# EAGLE board SparkFun BabyBuck Regulator - AP63203-Panel (EAGLE 9.5.2), part 1 of 6
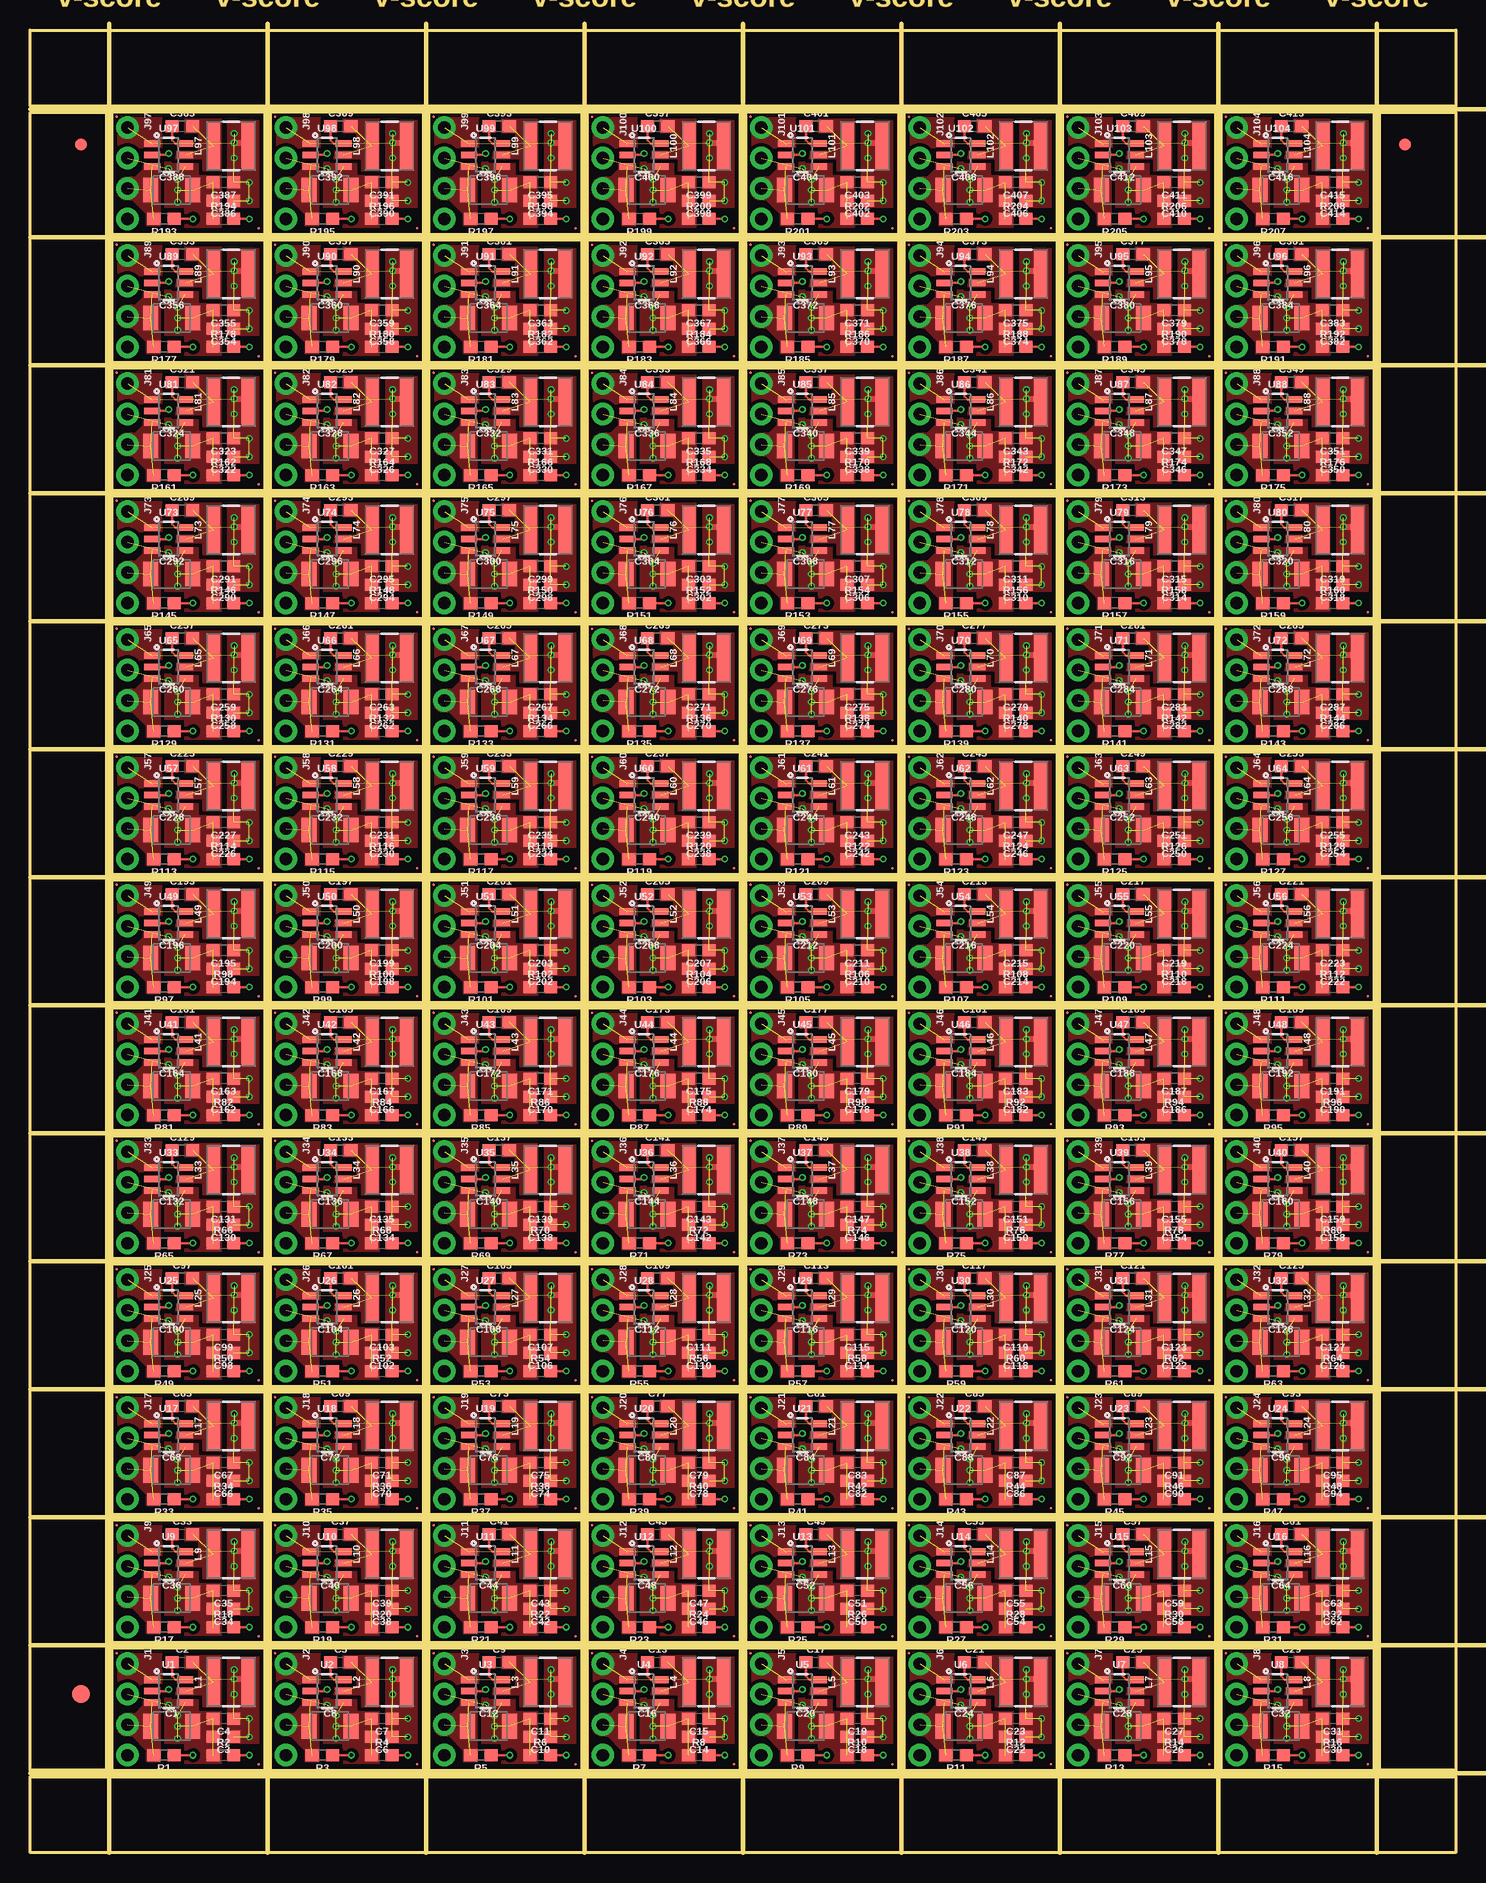
[diagram p0: board, top side]
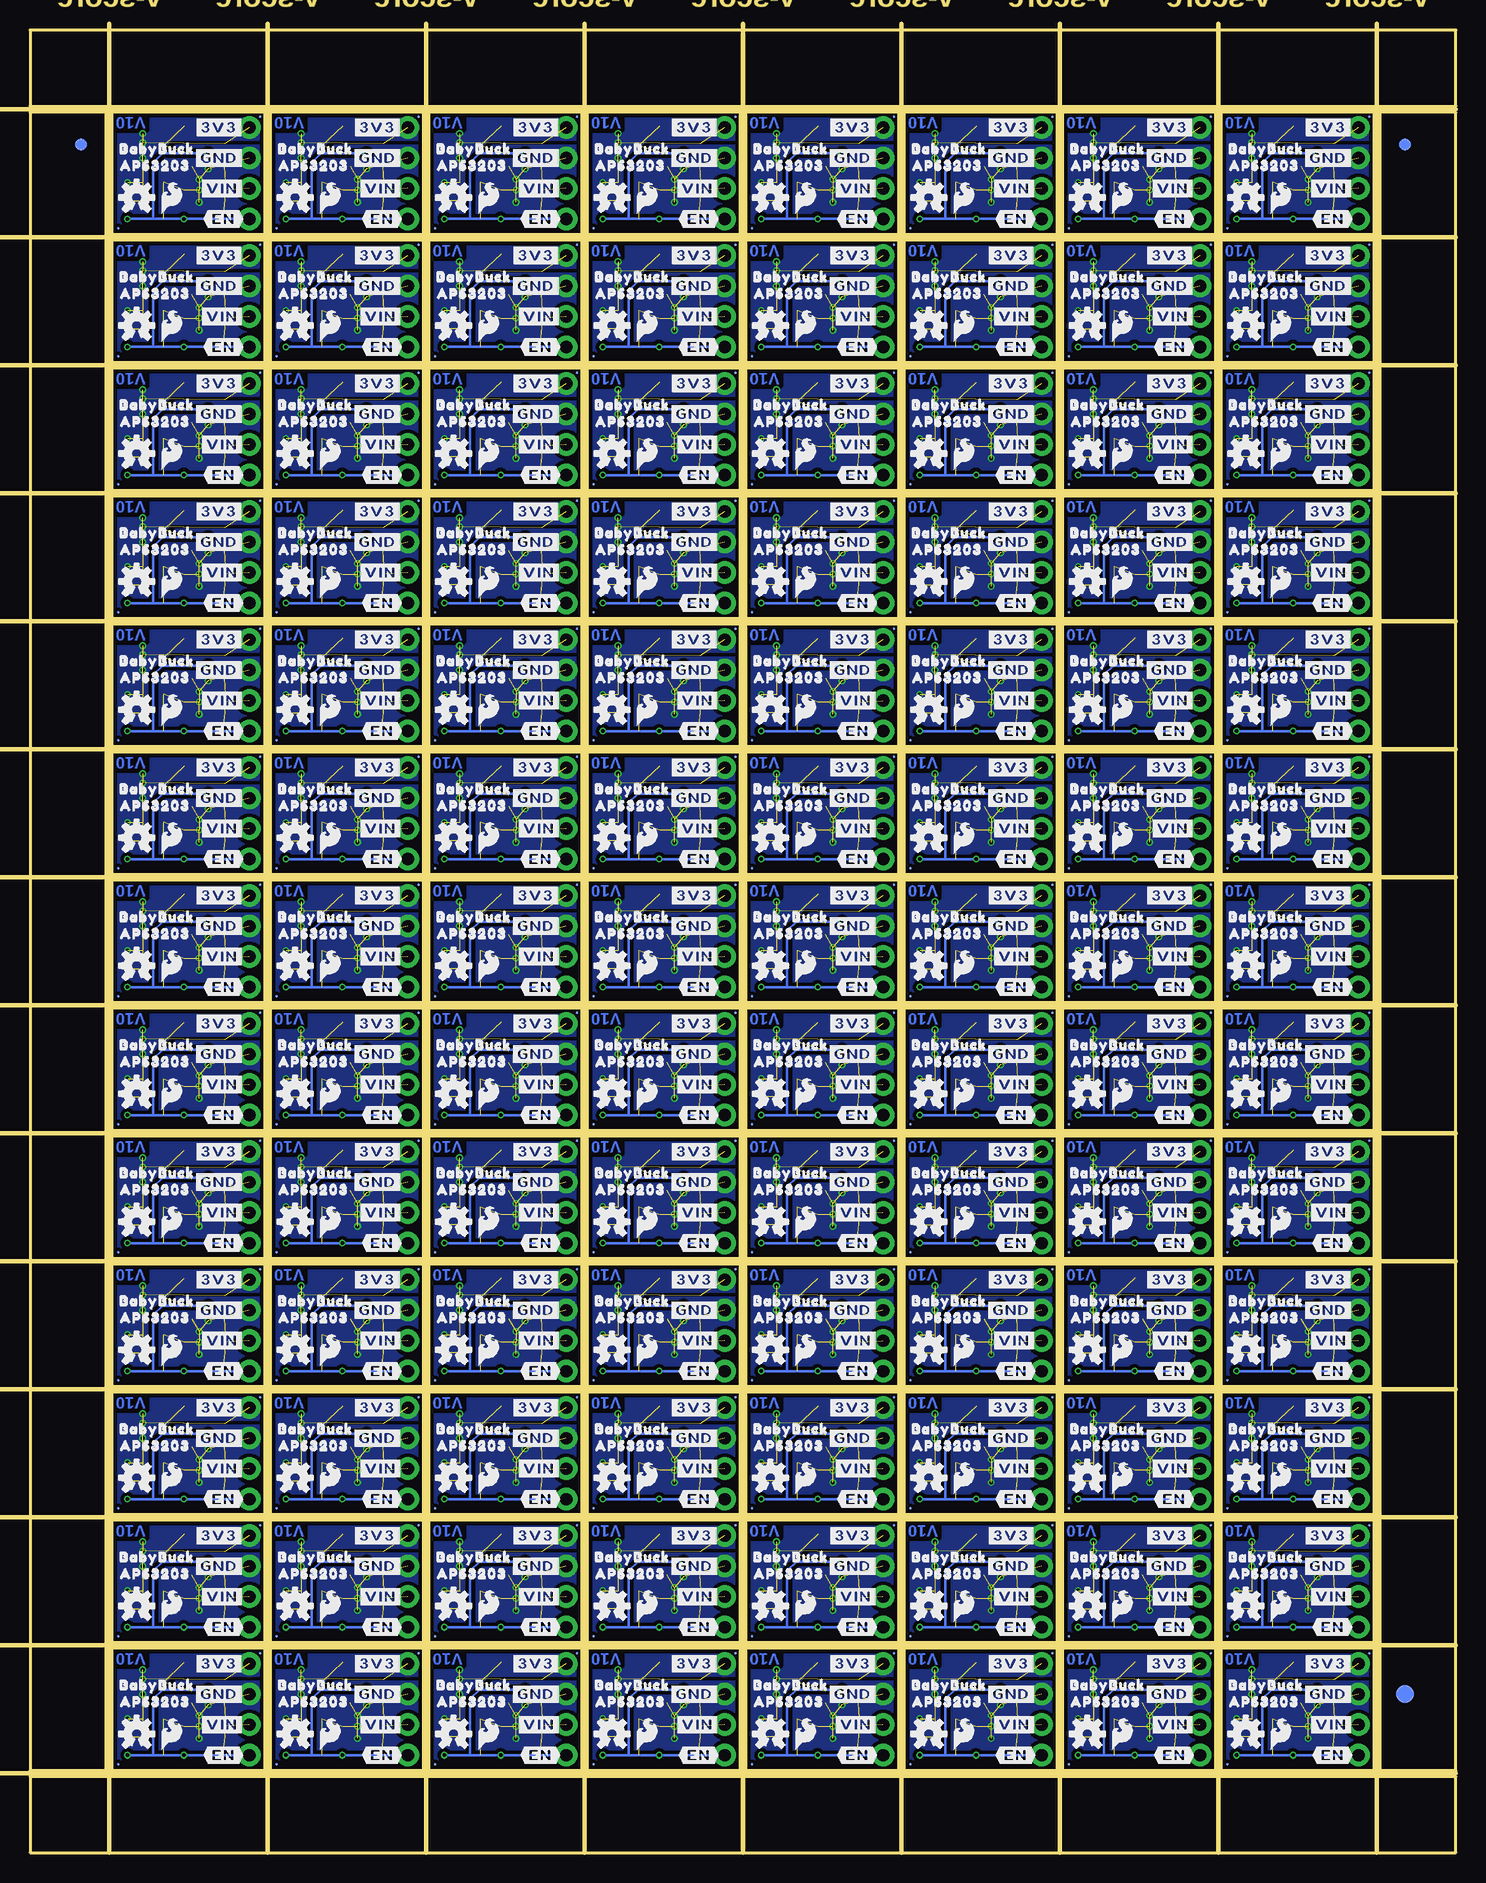
[diagram p1: board, bottom side, seen from below]

Size 118.87 x 151.89 mm. Coordinates in mm from the lower left corner, seen from the top.
Outline: 432 segments
Copper layers (1*16): Top 0.035mm / dielectric 1.5mm / Bottom 0.035mm
Design rules "SparkFun BabyBuck Regulator - AP63203": minimum track width 5mil, minimum drill 0.3mm, track to track 5mil, track to pad 5mil, pad to pad 5mil, via to via 5mil, smd to smd 5mil, copper to edge 7mil, drill to drill 7mil, minimum pad ring 5mil, minimum via ring 5mil, stop-mask expansion 2.5mil, vias tented up to drill 25mil, thermal gap 10mil
Milling: 23 lines

## Footprints (pad centres in the part's own frame; a part is rotated, then mirrored left to right if it is on the bottom)
1210 = smd 1.27 x 2.06: 1 -1.755,0; 2 1.755,0
0603 = smd 1.1 x 1: 1 -0.85,0; 2 0.85,0
FIDUCIAL-1X2 = smd 1 x 1: 1 0,0
FIDUCIAL-1.5X3 = smd 1.5 x 1.5: 1 0,0
FIDUCIAL-0.2MM = smd 0.2 x 0.2: 1 0,0
1X04_NO_SILK = drill 1.016 pad 1.88: 1 0,0; 2 2.54,0; 3 5.08,0; 4 7.62,0
INDUCTOR_4X4MM = smd 4.089 x 1.143: P$1 0,1.473; P$2 0,-1.473
SOT23-6 = smd 0.55 x 1.35: 1 -0.95,-1.375; 2 0,-1.375; 3 0.95,-1.375; 4 0.95,1.375; 5 0,1.375; 6 -0.95,1.375

## Placement (x,y rotation side)
C1  10uF  [1210]  11.81,10.54 0 top
C2  0.1uF  [0603]  12.7,15.88 0 top
C3  22uF  [0603]  16.13,9.65 180 top
C4  22uF  [0603]  16.13,11.18 180 top
C5  0.1uF  [0603]  25.91,15.88 0 top
C6  22uF  [0603]  29.34,9.65 180 top
C7  22uF  [0603]  29.34,11.18 180 top
C8  10uF  [1210]  25.02,10.54 0 top
C9  0.1uF  [0603]  39.12,15.88 0 top
C10  22uF  [0603]  42.54,9.65 180 top
C11  22uF  [0603]  42.54,11.18 180 top
C12  10uF  [1210]  38.23,10.54 0 top
C13  0.1uF  [0603]  52.32,15.88 0 top
C14  22uF  [0603]  55.75,9.65 180 top
C15  22uF  [0603]  55.75,11.18 180 top
C16  10uF  [1210]  51.43,10.54 0 top
C17  0.1uF  [0603]  65.53,15.88 0 top
C18  22uF  [0603]  68.96,9.65 180 top
C19  22uF  [0603]  68.96,11.18 180 top
C20  10uF  [1210]  64.64,10.54 0 top
C21  0.1uF  [0603]  78.74,15.88 0 top
C22  22uF  [0603]  82.17,9.65 180 top
C23  22uF  [0603]  82.17,11.18 180 top
C24  10uF  [1210]  77.85,10.54 0 top
C25  0.1uF  [0603]  91.95,15.88 0 top
C26  22uF  [0603]  95.38,9.65 180 top
C27  22uF  [0603]  95.38,11.18 180 top
C28  10uF  [1210]  91.06,10.54 0 top
C29  0.1uF  [0603]  105.16,15.88 0 top
C30  22uF  [0603]  108.59,9.65 180 top
C31  22uF  [0603]  108.59,11.18 180 top
C32  10uF  [1210]  104.27,10.54 0 top
C33  0.1uF  [0603]  12.7,26.54 0 top
C34  22uF  [0603]  16.13,20.32 180 top
C35  22uF  [0603]  16.13,21.84 180 top
C36  10uF  [1210]  11.81,21.21 0 top
C37  0.1uF  [0603]  25.91,26.54 0 top
C38  22uF  [0603]  29.34,20.32 180 top
C39  22uF  [0603]  29.34,21.84 180 top
C40  10uF  [1210]  25.02,21.21 0 top
C41  0.1uF  [0603]  39.12,26.54 0 top
C42  22uF  [0603]  42.54,20.32 180 top
C43  22uF  [0603]  42.54,21.84 180 top
C44  10uF  [1210]  38.23,21.21 0 top
C45  0.1uF  [0603]  52.32,26.54 0 top
C46  22uF  [0603]  55.75,20.32 180 top
C47  22uF  [0603]  55.75,21.84 180 top
C48  10uF  [1210]  51.43,21.21 0 top
C49  0.1uF  [0603]  65.53,26.54 0 top
C50  22uF  [0603]  68.96,20.32 180 top
C51  22uF  [0603]  68.96,21.84 180 top
C52  10uF  [1210]  64.64,21.21 0 top
C53  0.1uF  [0603]  78.74,26.54 0 top
C54  22uF  [0603]  82.17,20.32 180 top
C55  22uF  [0603]  82.17,21.84 180 top
C56  10uF  [1210]  77.85,21.21 0 top
C57  0.1uF  [0603]  91.95,26.54 0 top
C58  22uF  [0603]  95.38,20.32 180 top
C59  22uF  [0603]  95.38,21.84 180 top
C60  10uF  [1210]  91.06,21.21 0 top
C61  0.1uF  [0603]  105.16,26.54 0 top
C62  22uF  [0603]  108.59,20.32 180 top
C63  22uF  [0603]  108.59,21.84 180 top
C64  10uF  [1210]  104.27,21.21 0 top
C65  0.1uF  [0603]  12.7,37.21 0 top
C66  22uF  [0603]  16.13,30.99 180 top
C67  22uF  [0603]  16.13,32.51 180 top
C68  10uF  [1210]  11.81,31.88 0 top
C69  0.1uF  [0603]  25.91,37.21 0 top
C70  22uF  [0603]  29.34,30.99 180 top
C71  22uF  [0603]  29.34,32.51 180 top
C72  10uF  [1210]  25.02,31.88 0 top
C73  0.1uF  [0603]  39.12,37.21 0 top
C74  22uF  [0603]  42.54,30.99 180 top
C75  22uF  [0603]  42.54,32.51 180 top
C76  10uF  [1210]  38.23,31.88 0 top
C77  0.1uF  [0603]  52.32,37.21 0 top
C78  22uF  [0603]  55.75,30.99 180 top
C79  22uF  [0603]  55.75,32.51 180 top
C80  10uF  [1210]  51.43,31.88 0 top
C81  0.1uF  [0603]  65.53,37.21 0 top
C82  22uF  [0603]  68.96,30.99 180 top
C83  22uF  [0603]  68.96,32.51 180 top
C84  10uF  [1210]  64.64,31.88 0 top
C85  0.1uF  [0603]  78.74,37.21 0 top
C86  22uF  [0603]  82.17,30.99 180 top
C87  22uF  [0603]  82.17,32.51 180 top
C88  10uF  [1210]  77.85,31.88 0 top
C89  0.1uF  [0603]  91.95,37.21 0 top
C90  22uF  [0603]  95.38,30.99 180 top
C91  22uF  [0603]  95.38,32.51 180 top
C92  10uF  [1210]  91.06,31.88 0 top
C93  0.1uF  [0603]  105.16,37.21 0 top
C94  22uF  [0603]  108.59,30.99 180 top
C95  22uF  [0603]  108.59,32.51 180 top
C96  10uF  [1210]  104.27,31.88 0 top
C97  0.1uF  [0603]  12.7,47.88 0 top
C98  22uF  [0603]  16.13,41.66 180 top
C99  22uF  [0603]  16.13,43.18 180 top
C100  10uF  [1210]  11.81,42.54 0 top
C101  0.1uF  [0603]  25.91,47.88 0 top
C102  22uF  [0603]  29.34,41.66 180 top
C103  22uF  [0603]  29.34,43.18 180 top
C104  10uF  [1210]  25.02,42.54 0 top
C105  0.1uF  [0603]  39.12,47.88 0 top
C106  22uF  [0603]  42.54,41.66 180 top
C107  22uF  [0603]  42.54,43.18 180 top
C108  10uF  [1210]  38.23,42.54 0 top
C109  0.1uF  [0603]  52.32,47.88 0 top
C110  22uF  [0603]  55.75,41.66 180 top
C111  22uF  [0603]  55.75,43.18 180 top
C112  10uF  [1210]  51.43,42.54 0 top
C113  0.1uF  [0603]  65.53,47.88 0 top
C114  22uF  [0603]  68.96,41.66 180 top
C115  22uF  [0603]  68.96,43.18 180 top
C116  10uF  [1210]  64.64,42.54 0 top
C117  0.1uF  [0603]  78.74,47.88 0 top
C118  22uF  [0603]  82.17,41.66 180 top
C119  22uF  [0603]  82.17,43.18 180 top
C120  10uF  [1210]  77.85,42.54 0 top
C121  0.1uF  [0603]  91.95,47.88 0 top
C122  22uF  [0603]  95.38,41.66 180 top
C123  22uF  [0603]  95.38,43.18 180 top
C124  10uF  [1210]  91.06,42.54 0 top
C125  0.1uF  [0603]  105.16,47.88 0 top
C126  22uF  [0603]  108.59,41.66 180 top
C127  22uF  [0603]  108.59,43.18 180 top
C128  10uF  [1210]  104.27,42.54 0 top
C129  0.1uF  [0603]  12.7,58.55 0 top
C130  22uF  [0603]  16.13,52.32 180 top
C131  22uF  [0603]  16.13,53.85 180 top
C132  10uF  [1210]  11.81,53.21 0 top
C133  0.1uF  [0603]  25.91,58.55 0 top
C134  22uF  [0603]  29.34,52.32 180 top
C135  22uF  [0603]  29.34,53.85 180 top
C136  10uF  [1210]  25.02,53.21 0 top
C137  0.1uF  [0603]  39.12,58.55 0 top
C138  22uF  [0603]  42.54,52.32 180 top
C139  22uF  [0603]  42.54,53.85 180 top
C140  10uF  [1210]  38.23,53.21 0 top
C141  0.1uF  [0603]  52.32,58.55 0 top
C142  22uF  [0603]  55.75,52.32 180 top
C143  22uF  [0603]  55.75,53.85 180 top
C144  10uF  [1210]  51.43,53.21 0 top
C145  0.1uF  [0603]  65.53,58.55 0 top
C146  22uF  [0603]  68.96,52.32 180 top
C147  22uF  [0603]  68.96,53.85 180 top
C148  10uF  [1210]  64.64,53.21 0 top
C149  0.1uF  [0603]  78.74,58.55 0 top
C150  22uF  [0603]  82.17,52.32 180 top
C151  22uF  [0603]  82.17,53.85 180 top
C152  10uF  [1210]  77.85,53.21 0 top
C153  0.1uF  [0603]  91.95,58.55 0 top
C154  22uF  [0603]  95.38,52.32 180 top
C155  22uF  [0603]  95.38,53.85 180 top
C156  10uF  [1210]  91.06,53.21 0 top
C157  0.1uF  [0603]  105.16,58.55 0 top
C158  22uF  [0603]  108.59,52.32 180 top
C159  22uF  [0603]  108.59,53.85 180 top
C160  10uF  [1210]  104.27,53.21 0 top
C161  0.1uF  [0603]  12.7,69.22 0 top
C162  22uF  [0603]  16.13,62.99 180 top
C163  22uF  [0603]  16.13,64.52 180 top
C164  10uF  [1210]  11.81,63.88 0 top
C165  0.1uF  [0603]  25.91,69.22 0 top
C166  22uF  [0603]  29.34,62.99 180 top
C167  22uF  [0603]  29.34,64.52 180 top
C168  10uF  [1210]  25.02,63.88 0 top
C169  0.1uF  [0603]  39.12,69.22 0 top
C170  22uF  [0603]  42.54,62.99 180 top
C171  22uF  [0603]  42.54,64.52 180 top
C172  10uF  [1210]  38.23,63.88 0 top
C173  0.1uF  [0603]  52.32,69.22 0 top
C174  22uF  [0603]  55.75,62.99 180 top
C175  22uF  [0603]  55.75,64.52 180 top
C176  10uF  [1210]  51.43,63.88 0 top
C177  0.1uF  [0603]  65.53,69.22 0 top
C178  22uF  [0603]  68.96,62.99 180 top
C179  22uF  [0603]  68.96,64.52 180 top
C180  10uF  [1210]  64.64,63.88 0 top
C181  0.1uF  [0603]  78.74,69.22 0 top
C182  22uF  [0603]  82.17,62.99 180 top
C183  22uF  [0603]  82.17,64.52 180 top
C184  10uF  [1210]  77.85,63.88 0 top
C185  0.1uF  [0603]  91.95,69.22 0 top
C186  22uF  [0603]  95.38,62.99 180 top
C187  22uF  [0603]  95.38,64.52 180 top
C188  10uF  [1210]  91.06,63.88 0 top
C189  0.1uF  [0603]  105.16,69.22 0 top
C190  22uF  [0603]  108.59,62.99 180 top
C191  22uF  [0603]  108.59,64.52 180 top
C192  10uF  [1210]  104.27,63.88 0 top
C193  0.1uF  [0603]  12.7,79.88 0 top
C194  22uF  [0603]  16.13,73.66 180 top
C195  22uF  [0603]  16.13,75.18 180 top
C196  10uF  [1210]  11.81,74.55 0 top
C197  0.1uF  [0603]  25.91,79.88 0 top
C198  22uF  [0603]  29.34,73.66 180 top
C199  22uF  [0603]  29.34,75.18 180 top
C200  10uF  [1210]  25.02,74.55 0 top
C201  0.1uF  [0603]  39.12,79.88 0 top
C202  22uF  [0603]  42.54,73.66 180 top
C203  22uF  [0603]  42.54,75.18 180 top
C204  10uF  [1210]  38.23,74.55 0 top
C205  0.1uF  [0603]  52.32,79.88 0 top
C206  22uF  [0603]  55.75,73.66 180 top
C207  22uF  [0603]  55.75,75.18 180 top
C208  10uF  [1210]  51.43,74.55 0 top
C209  0.1uF  [0603]  65.53,79.88 0 top
C210  22uF  [0603]  68.96,73.66 180 top
C211  22uF  [0603]  68.96,75.18 180 top
C212  10uF  [1210]  64.64,74.55 0 top
C213  0.1uF  [0603]  78.74,79.88 0 top
C214  22uF  [0603]  82.17,73.66 180 top
C215  22uF  [0603]  82.17,75.18 180 top
C216  10uF  [1210]  77.85,74.55 0 top
C217  0.1uF  [0603]  91.95,79.88 0 top
C218  22uF  [0603]  95.38,73.66 180 top
C219  22uF  [0603]  95.38,75.18 180 top
C220  10uF  [1210]  91.06,74.55 0 top
C221  0.1uF  [0603]  105.16,79.88 0 top
C222  22uF  [0603]  108.59,73.66 180 top
C223  22uF  [0603]  108.59,75.18 180 top
C224  10uF  [1210]  104.27,74.55 0 top
C225  0.1uF  [0603]  12.7,90.55 0 top
C226  22uF  [0603]  16.13,84.33 180 top
C227  22uF  [0603]  16.13,85.85 180 top
C228  10uF  [1210]  11.81,85.22 0 top
C229  0.1uF  [0603]  25.91,90.55 0 top
C230  22uF  [0603]  29.34,84.33 180 top
C231  22uF  [0603]  29.34,85.85 180 top
C232  10uF  [1210]  25.02,85.22 0 top
C233  0.1uF  [0603]  39.12,90.55 0 top
C234  22uF  [0603]  42.54,84.33 180 top
C235  22uF  [0603]  42.54,85.85 180 top
C236  10uF  [1210]  38.23,85.22 0 top
C237  0.1uF  [0603]  52.32,90.55 0 top
C238  22uF  [0603]  55.75,84.33 180 top
C239  22uF  [0603]  55.75,85.85 180 top
C240  10uF  [1210]  51.43,85.22 0 top
C241  0.1uF  [0603]  65.53,90.55 0 top
C242  22uF  [0603]  68.96,84.33 180 top
C243  22uF  [0603]  68.96,85.85 180 top
C244  10uF  [1210]  64.64,85.22 0 top
C245  0.1uF  [0603]  78.74,90.55 0 top
C246  22uF  [0603]  82.17,84.33 180 top
C247  22uF  [0603]  82.17,85.85 180 top
C248  10uF  [1210]  77.85,85.22 0 top
C249  0.1uF  [0603]  91.95,90.55 0 top
C250  22uF  [0603]  95.38,84.33 180 top
C251  22uF  [0603]  95.38,85.85 180 top
C252  10uF  [1210]  91.06,85.22 0 top
C253  0.1uF  [0603]  105.16,90.55 0 top
C254  22uF  [0603]  108.59,84.33 180 top
C255  22uF  [0603]  108.59,85.85 180 top
C256  10uF  [1210]  104.27,85.22 0 top
C257  0.1uF  [0603]  12.7,101.22 0 top
C258  22uF  [0603]  16.13,95 180 top
C259  22uF  [0603]  16.13,96.52 180 top
C260  10uF  [1210]  11.81,95.89 0 top
C261  0.1uF  [0603]  25.91,101.22 0 top
C262  22uF  [0603]  29.34,95 180 top
C263  22uF  [0603]  29.34,96.52 180 top
C264  10uF  [1210]  25.02,95.89 0 top
C265  0.1uF  [0603]  39.12,101.22 0 top
C266  22uF  [0603]  42.54,95 180 top
C267  22uF  [0603]  42.54,96.52 180 top
C268  10uF  [1210]  38.23,95.89 0 top
C269  0.1uF  [0603]  52.32,101.22 0 top
C270  22uF  [0603]  55.75,95 180 top
C271  22uF  [0603]  55.75,96.52 180 top
C272  10uF  [1210]  51.43,95.89 0 top
C273  0.1uF  [0603]  65.53,101.22 0 top
C274  22uF  [0603]  68.96,95 180 top
C275  22uF  [0603]  68.96,96.52 180 top
C276  10uF  [1210]  64.64,95.89 0 top
C277  0.1uF  [0603]  78.74,101.22 0 top
C278  22uF  [0603]  82.17,95 180 top
C279  22uF  [0603]  82.17,96.52 180 top
C280  10uF  [1210]  77.85,95.89 0 top
C281  0.1uF  [0603]  91.95,101.22 0 top
C282  22uF  [0603]  95.38,95 180 top
C283  22uF  [0603]  95.38,96.52 180 top
C284  10uF  [1210]  91.06,95.89 0 top
C285  0.1uF  [0603]  105.16,101.22 0 top
C286  22uF  [0603]  108.59,95 180 top
C287  22uF  [0603]  108.59,96.52 180 top
C288  10uF  [1210]  104.27,95.89 0 top
C289  0.1uF  [0603]  12.7,111.89 0 top
C290  22uF  [0603]  16.13,105.66 180 top
C291  22uF  [0603]  16.13,107.19 180 top
C292  10uF  [1210]  11.81,106.55 0 top
C293  0.1uF  [0603]  25.91,111.89 0 top
C294  22uF  [0603]  29.34,105.66 180 top
C295  22uF  [0603]  29.34,107.19 180 top
C296  10uF  [1210]  25.02,106.55 0 top
C297  0.1uF  [0603]  39.12,111.89 0 top
C298  22uF  [0603]  42.54,105.66 180 top
C299  22uF  [0603]  42.54,107.19 180 top
C300  10uF  [1210]  38.23,106.55 0 top
C301  0.1uF  [0603]  52.32,111.89 0 top
C302  22uF  [0603]  55.75,105.66 180 top
C303  22uF  [0603]  55.75,107.19 180 top
C304  10uF  [1210]  51.43,106.55 0 top
C305  0.1uF  [0603]  65.53,111.89 0 top
C306  22uF  [0603]  68.96,105.66 180 top
C307  22uF  [0603]  68.96,107.19 180 top
C308  10uF  [1210]  64.64,106.55 0 top
C309  0.1uF  [0603]  78.74,111.89 0 top
C310  22uF  [0603]  82.17,105.66 180 top
C311  22uF  [0603]  82.17,107.19 180 top
C312  10uF  [1210]  77.85,106.55 0 top
C313  0.1uF  [0603]  91.95,111.89 0 top
C314  22uF  [0603]  95.38,105.66 180 top
C315  22uF  [0603]  95.38,107.19 180 top
C316  10uF  [1210]  91.06,106.55 0 top
C317  0.1uF  [0603]  105.16,111.89 0 top
C318  22uF  [0603]  108.59,105.66 180 top
C319  22uF  [0603]  108.59,107.19 180 top
C320  10uF  [1210]  104.27,106.55 0 top
C321  0.1uF  [0603]  12.7,122.56 0 top
C322  22uF  [0603]  16.13,116.33 180 top
C323  22uF  [0603]  16.13,117.86 180 top
C324  10uF  [1210]  11.81,117.22 0 top
C325  0.1uF  [0603]  25.91,122.56 0 top
C326  22uF  [0603]  29.34,116.33 180 top
C327  22uF  [0603]  29.34,117.86 180 top
C328  10uF  [1210]  25.02,117.22 0 top
C329  0.1uF  [0603]  39.12,122.56 0 top
C330  22uF  [0603]  42.54,116.33 180 top
C331  22uF  [0603]  42.54,117.86 180 top
C332  10uF  [1210]  38.23,117.22 0 top
C333  0.1uF  [0603]  52.32,122.56 0 top
C334  22uF  [0603]  55.75,116.33 180 top
C335  22uF  [0603]  55.75,117.86 180 top
C336  10uF  [1210]  51.43,117.22 0 top
C337  0.1uF  [0603]  65.53,122.56 0 top
C338  22uF  [0603]  68.96,116.33 180 top
C339  22uF  [0603]  68.96,117.86 180 top
C340  10uF  [1210]  64.64,117.22 0 top
C341  0.1uF  [0603]  78.74,122.56 0 top
C342  22uF  [0603]  82.17,116.33 180 top
C343  22uF  [0603]  82.17,117.86 180 top
C344  10uF  [1210]  77.85,117.22 0 top
C345  0.1uF  [0603]  91.95,122.56 0 top
C346  22uF  [0603]  95.38,116.33 180 top
C347  22uF  [0603]  95.38,117.86 180 top
C348  10uF  [1210]  91.06,117.22 0 top
C349  0.1uF  [0603]  105.16,122.56 0 top
C350  22uF  [0603]  108.59,116.33 180 top
C351  22uF  [0603]  108.59,117.86 180 top
C352  10uF  [1210]  104.27,117.22 0 top
C353  0.1uF  [0603]  12.7,133.22 0 top
C354  22uF  [0603]  16.13,127 180 top
C355  22uF  [0603]  16.13,128.52 180 top
C356  10uF  [1210]  11.81,127.89 0 top
C357  0.1uF  [0603]  25.91,133.22 0 top
C358  22uF  [0603]  29.34,127 180 top
C359  22uF  [0603]  29.34,128.52 180 top
C360  10uF  [1210]  25.02,127.89 0 top
C361  0.1uF  [0603]  39.12,133.22 0 top
C362  22uF  [0603]  42.54,127 180 top
C363  22uF  [0603]  42.54,128.52 180 top
C364  10uF  [1210]  38.23,127.89 0 top
C365  0.1uF  [0603]  52.32,133.22 0 top
C366  22uF  [0603]  55.75,127 180 top
C367  22uF  [0603]  55.75,128.52 180 top
C368  10uF  [1210]  51.43,127.89 0 top
C369  0.1uF  [0603]  65.53,133.22 0 top
C370  22uF  [0603]  68.96,127 180 top
C371  22uF  [0603]  68.96,128.52 180 top
C372  10uF  [1210]  64.64,127.89 0 top
C373  0.1uF  [0603]  78.74,133.22 0 top
C374  22uF  [0603]  82.17,127 180 top
C375  22uF  [0603]  82.17,128.52 180 top
C376  10uF  [1210]  77.85,127.89 0 top
C377  0.1uF  [0603]  91.95,133.22 0 top
C378  22uF  [0603]  95.38,127 180 top
C379  22uF  [0603]  95.38,128.52 180 top
C380  10uF  [1210]  91.06,127.89 0 top
C381  0.1uF  [0603]  105.16,133.22 0 top
C382  22uF  [0603]  108.59,127 180 top
C383  22uF  [0603]  108.59,128.52 180 top
C384  10uF  [1210]  104.27,127.89 0 top
C385  0.1uF  [0603]  12.7,143.89 0 top
C386  22uF  [0603]  16.13,137.67 180 top
C387  22uF  [0603]  16.13,139.19 180 top
C388  10uF  [1210]  11.81,138.56 0 top
C389  0.1uF  [0603]  25.91,143.89 0 top
C390  22uF  [0603]  29.34,137.67 180 top
C391  22uF  [0603]  29.34,139.19 180 top
C392  10uF  [1210]  25.02,138.56 0 top
C393  0.1uF  [0603]  39.12,143.89 0 top
C394  22uF  [0603]  42.54,137.67 180 top
C395  22uF  [0603]  42.54,139.19 180 top
C396  10uF  [1210]  38.23,138.56 0 top
C397  0.1uF  [0603]  52.32,143.89 0 top
C398  22uF  [0603]  55.75,137.67 180 top
C399  22uF  [0603]  55.75,139.19 180 top
C400  10uF  [1210]  51.43,138.56 0 top
C401  0.1uF  [0603]  65.53,143.89 0 top
C402  22uF  [0603]  68.96,137.67 180 top
C403  22uF  [0603]  68.96,139.19 180 top
C404  10uF  [1210]  64.64,138.56 0 top
C405  0.1uF  [0603]  78.74,143.89 0 top
C406  22uF  [0603]  82.17,137.67 180 top
C407  22uF  [0603]  82.17,139.19 180 top
C408  10uF  [1210]  77.85,138.56 0 top
C409  0.1uF  [0603]  91.95,143.89 0 top
C410  22uF  [0603]  95.38,137.67 180 top
C411  22uF  [0603]  95.38,139.19 180 top
C412  10uF  [1210]  91.06,138.56 0 top
C413  0.1uF  [0603]  105.16,143.89 0 top
C414  22uF  [0603]  108.59,137.67 180 top
C415  22uF  [0603]  108.59,139.19 180 top
C416  10uF  [1210]  104.27,138.56 0 top
E$1  [FIDUCIAL-1X2]  4.23,142.37 0 top
E$2  [FIDUCIAL-1X2]  4.23,142.37 0 bottom
E$3  [FIDUCIAL-1X2]  114.64,142.37 0 top
E$4  [FIDUCIAL-1X2]  114.64,142.37 0 bottom
E$5  [FIDUCIAL-1.5X3]  4.23,13.21 0 top
E$6  [FIDUCIAL-1.5X3]  4.23,13.21 0 bottom
FD1  FIDUCIAL0.2MM  [FIDUCIAL-0.2MM]  19.05,7.37 0 top
FD2  FIDUCIAL0.2MM  [FIDUCIAL-0.2MM]  19.05,7.37 0 bottom
FD3  FIDUCIAL0.2MM  [FIDUCIAL-0.2MM]  7.24,16.64 0 top
FD4  FIDUCIAL0.2MM  [FIDUCIAL-0.2MM]  7.24,16.64 0 bottom
FD5  FIDUCIAL0.2MM  [FIDUCIAL-0.2MM]  32.26,7.37 0 top
FD6  FIDUCIAL0.2MM  [FIDUCIAL-0.2MM]  32.26,7.37 0 bottom
FD7  FIDUCIAL0.2MM  [FIDUCIAL-0.2MM]  20.45,16.64 0 top
FD8  FIDUCIAL0.2MM  [FIDUCIAL-0.2MM]  20.45,16.64 0 bottom
FD9  FIDUCIAL0.2MM  [FIDUCIAL-0.2MM]  45.47,7.37 0 top
FD10  FIDUCIAL0.2MM  [FIDUCIAL-0.2MM]  45.47,7.37 0 bottom
FD11  FIDUCIAL0.2MM  [FIDUCIAL-0.2MM]  33.66,16.64 0 top
FD12  FIDUCIAL0.2MM  [FIDUCIAL-0.2MM]  33.66,16.64 0 bottom
FD13  FIDUCIAL0.2MM  [FIDUCIAL-0.2MM]  58.67,7.37 0 top
FD14  FIDUCIAL0.2MM  [FIDUCIAL-0.2MM]  58.67,7.37 0 bottom
FD15  FIDUCIAL0.2MM  [FIDUCIAL-0.2MM]  46.86,16.64 0 top
FD16  FIDUCIAL0.2MM  [FIDUCIAL-0.2MM]  46.86,16.64 0 bottom
FD17  FIDUCIAL0.2MM  [FIDUCIAL-0.2MM]  71.88,7.37 0 top
FD18  FIDUCIAL0.2MM  [FIDUCIAL-0.2MM]  71.88,7.37 0 bottom
FD19  FIDUCIAL0.2MM  [FIDUCIAL-0.2MM]  60.07,16.64 0 top
FD20  FIDUCIAL0.2MM  [FIDUCIAL-0.2MM]  60.07,16.64 0 bottom
FD21  FIDUCIAL0.2MM  [FIDUCIAL-0.2MM]  85.09,7.37 0 top
FD22  FIDUCIAL0.2MM  [FIDUCIAL-0.2MM]  85.09,7.37 0 bottom
FD23  FIDUCIAL0.2MM  [FIDUCIAL-0.2MM]  73.28,16.64 0 top
FD24  FIDUCIAL0.2MM  [FIDUCIAL-0.2MM]  73.28,16.64 0 bottom
FD25  FIDUCIAL0.2MM  [FIDUCIAL-0.2MM]  98.3,7.37 0 top
FD26  FIDUCIAL0.2MM  [FIDUCIAL-0.2MM]  98.3,7.37 0 bottom
FD27  FIDUCIAL0.2MM  [FIDUCIAL-0.2MM]  86.49,16.64 0 top
FD28  FIDUCIAL0.2MM  [FIDUCIAL-0.2MM]  86.49,16.64 0 bottom
FD29  FIDUCIAL0.2MM  [FIDUCIAL-0.2MM]  111.51,7.37 0 top
FD30  FIDUCIAL0.2MM  [FIDUCIAL-0.2MM]  111.51,7.37 0 bottom
FD31  FIDUCIAL0.2MM  [FIDUCIAL-0.2MM]  99.7,16.64 0 top
FD32  FIDUCIAL0.2MM  [FIDUCIAL-0.2MM]  99.7,16.64 0 bottom
FD33  FIDUCIAL0.2MM  [FIDUCIAL-0.2MM]  19.05,18.03 0 top
FD34  FIDUCIAL0.2MM  [FIDUCIAL-0.2MM]  19.05,18.03 0 bottom
FD35  FIDUCIAL0.2MM  [FIDUCIAL-0.2MM]  7.24,27.3 0 top
FD36  FIDUCIAL0.2MM  [FIDUCIAL-0.2MM]  7.24,27.3 0 bottom
FD37  FIDUCIAL0.2MM  [FIDUCIAL-0.2MM]  32.26,18.03 0 top
FD38  FIDUCIAL0.2MM  [FIDUCIAL-0.2MM]  32.26,18.03 0 bottom
FD39  FIDUCIAL0.2MM  [FIDUCIAL-0.2MM]  20.45,27.3 0 top
FD40  FIDUCIAL0.2MM  [FIDUCIAL-0.2MM]  20.45,27.3 0 bottom
FD41  FIDUCIAL0.2MM  [FIDUCIAL-0.2MM]  45.47,18.03 0 top
FD42  FIDUCIAL0.2MM  [FIDUCIAL-0.2MM]  45.47,18.03 0 bottom
FD43  FIDUCIAL0.2MM  [FIDUCIAL-0.2MM]  33.66,27.3 0 top
FD44  FIDUCIAL0.2MM  [FIDUCIAL-0.2MM]  33.66,27.3 0 bottom
FD45  FIDUCIAL0.2MM  [FIDUCIAL-0.2MM]  58.67,18.03 0 top
FD46  FIDUCIAL0.2MM  [FIDUCIAL-0.2MM]  58.67,18.03 0 bottom
FD47  FIDUCIAL0.2MM  [FIDUCIAL-0.2MM]  46.86,27.3 0 top
FD48  FIDUCIAL0.2MM  [FIDUCIAL-0.2MM]  46.86,27.3 0 bottom
FD49  FIDUCIAL0.2MM  [FIDUCIAL-0.2MM]  71.88,18.03 0 top
FD50  FIDUCIAL0.2MM  [FIDUCIAL-0.2MM]  71.88,18.03 0 bottom
FD51  FIDUCIAL0.2MM  [FIDUCIAL-0.2MM]  60.07,27.3 0 top
FD52  FIDUCIAL0.2MM  [FIDUCIAL-0.2MM]  60.07,27.3 0 bottom
FD53  FIDUCIAL0.2MM  [FIDUCIAL-0.2MM]  85.09,18.03 0 top
FD54  FIDUCIAL0.2MM  [FIDUCIAL-0.2MM]  85.09,18.03 0 bottom
FD55  FIDUCIAL0.2MM  [FIDUCIAL-0.2MM]  73.28,27.3 0 top
FD56  FIDUCIAL0.2MM  [FIDUCIAL-0.2MM]  73.28,27.3 0 bottom
FD57  FIDUCIAL0.2MM  [FIDUCIAL-0.2MM]  98.3,18.03 0 top
FD58  FIDUCIAL0.2MM  [FIDUCIAL-0.2MM]  98.3,18.03 0 bottom
FD59  FIDUCIAL0.2MM  [FIDUCIAL-0.2MM]  86.49,27.3 0 top
FD60  FIDUCIAL0.2MM  [FIDUCIAL-0.2MM]  86.49,27.3 0 bottom
FD61  FIDUCIAL0.2MM  [FIDUCIAL-0.2MM]  111.51,18.03 0 top
FD62  FIDUCIAL0.2MM  [FIDUCIAL-0.2MM]  111.51,18.03 0 bottom
FD63  FIDUCIAL0.2MM  [FIDUCIAL-0.2MM]  99.7,27.3 0 top
FD64  FIDUCIAL0.2MM  [FIDUCIAL-0.2MM]  99.7,27.3 0 bottom
FD65  FIDUCIAL0.2MM  [FIDUCIAL-0.2MM]  19.05,28.7 0 top
FD66  FIDUCIAL0.2MM  [FIDUCIAL-0.2MM]  19.05,28.7 0 bottom
FD67  FIDUCIAL0.2MM  [FIDUCIAL-0.2MM]  7.24,37.97 0 top
FD68  FIDUCIAL0.2MM  [FIDUCIAL-0.2MM]  7.24,37.97 0 bottom
FD69  FIDUCIAL0.2MM  [FIDUCIAL-0.2MM]  32.26,28.7 0 top
FD70  FIDUCIAL0.2MM  [FIDUCIAL-0.2MM]  32.26,28.7 0 bottom
FD71  FIDUCIAL0.2MM  [FIDUCIAL-0.2MM]  20.45,37.97 0 top
FD72  FIDUCIAL0.2MM  [FIDUCIAL-0.2MM]  20.45,37.97 0 bottom
FD73  FIDUCIAL0.2MM  [FIDUCIAL-0.2MM]  45.47,28.7 0 top
FD74  FIDUCIAL0.2MM  [FIDUCIAL-0.2MM]  45.47,28.7 0 bottom
FD75  FIDUCIAL0.2MM  [FIDUCIAL-0.2MM]  33.66,37.97 0 top
FD76  FIDUCIAL0.2MM  [FIDUCIAL-0.2MM]  33.66,37.97 0 bottom
FD77  FIDUCIAL0.2MM  [FIDUCIAL-0.2MM]  58.67,28.7 0 top
FD78  FIDUCIAL0.2MM  [FIDUCIAL-0.2MM]  58.67,28.7 0 bottom
FD79  FIDUCIAL0.2MM  [FIDUCIAL-0.2MM]  46.86,37.97 0 top
FD80  FIDUCIAL0.2MM  [FIDUCIAL-0.2MM]  46.86,37.97 0 bottom
FD81  FIDUCIAL0.2MM  [FIDUCIAL-0.2MM]  71.88,28.7 0 top
FD82  FIDUCIAL0.2MM  [FIDUCIAL-0.2MM]  71.88,28.7 0 bottom
FD83  FIDUCIAL0.2MM  [FIDUCIAL-0.2MM]  60.07,37.97 0 top
FD84  FIDUCIAL0.2MM  [FIDUCIAL-0.2MM]  60.07,37.97 0 bottom
FD85  FIDUCIAL0.2MM  [FIDUCIAL-0.2MM]  85.09,28.7 0 top
FD86  FIDUCIAL0.2MM  [FIDUCIAL-0.2MM]  85.09,28.7 0 bottom
FD87  FIDUCIAL0.2MM  [FIDUCIAL-0.2MM]  73.28,37.97 0 top
FD88  FIDUCIAL0.2MM  [FIDUCIAL-0.2MM]  73.28,37.97 0 bottom
FD89  FIDUCIAL0.2MM  [FIDUCIAL-0.2MM]  98.3,28.7 0 top
FD90  FIDUCIAL0.2MM  [FIDUCIAL-0.2MM]  98.3,28.7 0 bottom
FD91  FIDUCIAL0.2MM  [FIDUCIAL-0.2MM]  86.49,37.97 0 top
FD92  FIDUCIAL0.2MM  [FIDUCIAL-0.2MM]  86.49,37.97 0 bottom
FD93  FIDUCIAL0.2MM  [FIDUCIAL-0.2MM]  111.51,28.7 0 top
FD94  FIDUCIAL0.2MM  [FIDUCIAL-0.2MM]  111.51,28.7 0 bottom
FD95  FIDUCIAL0.2MM  [FIDUCIAL-0.2MM]  99.7,37.97 0 top
FD96  FIDUCIAL0.2MM  [FIDUCIAL-0.2MM]  99.7,37.97 0 bottom
FD97  FIDUCIAL0.2MM  [FIDUCIAL-0.2MM]  19.05,39.37 0 top
FD98  FIDUCIAL0.2MM  [FIDUCIAL-0.2MM]  19.05,39.37 0 bottom
FD99  FIDUCIAL0.2MM  [FIDUCIAL-0.2MM]  7.24,48.64 0 top
FD100  FIDUCIAL0.2MM  [FIDUCIAL-0.2MM]  7.24,48.64 0 bottom
FD101  FIDUCIAL0.2MM  [FIDUCIAL-0.2MM]  32.26,39.37 0 top
FD102  FIDUCIAL0.2MM  [FIDUCIAL-0.2MM]  32.26,39.37 0 bottom
FD103  FIDUCIAL0.2MM  [FIDUCIAL-0.2MM]  20.45,48.64 0 top
FD104  FIDUCIAL0.2MM  [FIDUCIAL-0.2MM]  20.45,48.64 0 bottom
FD105  FIDUCIAL0.2MM  [FIDUCIAL-0.2MM]  45.47,39.37 0 top
FD106  FIDUCIAL0.2MM  [FIDUCIAL-0.2MM]  45.47,39.37 0 bottom
FD107  FIDUCIAL0.2MM  [FIDUCIAL-0.2MM]  33.66,48.64 0 top
FD108  FIDUCIAL0.2MM  [FIDUCIAL-0.2MM]  33.66,48.64 0 bottom
FD109  FIDUCIAL0.2MM  [FIDUCIAL-0.2MM]  58.67,39.37 0 top
FD110  FIDUCIAL0.2MM  [FIDUCIAL-0.2MM]  58.67,39.37 0 bottom
FD111  FIDUCIAL0.2MM  [FIDUCIAL-0.2MM]  46.86,48.64 0 top
FD112  FIDUCIAL0.2MM  [FIDUCIAL-0.2MM]  46.86,48.64 0 bottom
FD113  FIDUCIAL0.2MM  [FIDUCIAL-0.2MM]  71.88,39.37 0 top
FD114  FIDUCIAL0.2MM  [FIDUCIAL-0.2MM]  71.88,39.37 0 bottom
FD115  FIDUCIAL0.2MM  [FIDUCIAL-0.2MM]  60.07,48.64 0 top
FD116  FIDUCIAL0.2MM  [FIDUCIAL-0.2MM]  60.07,48.64 0 bottom
FD117  FIDUCIAL0.2MM  [FIDUCIAL-0.2MM]  85.09,39.37 0 top
FD118  FIDUCIAL0.2MM  [FIDUCIAL-0.2MM]  85.09,39.37 0 bottom
FD119  FIDUCIAL0.2MM  [FIDUCIAL-0.2MM]  73.28,48.64 0 top
FD120  FIDUCIAL0.2MM  [FIDUCIAL-0.2MM]  73.28,48.64 0 bottom
FD121  FIDUCIAL0.2MM  [FIDUCIAL-0.2MM]  98.3,39.37 0 top
FD122  FIDUCIAL0.2MM  [FIDUCIAL-0.2MM]  98.3,39.37 0 bottom
FD123  FIDUCIAL0.2MM  [FIDUCIAL-0.2MM]  86.49,48.64 0 top
FD124  FIDUCIAL0.2MM  [FIDUCIAL-0.2MM]  86.49,48.64 0 bottom
FD125  FIDUCIAL0.2MM  [FIDUCIAL-0.2MM]  111.51,39.37 0 top
FD126  FIDUCIAL0.2MM  [FIDUCIAL-0.2MM]  111.51,39.37 0 bottom
FD127  FIDUCIAL0.2MM  [FIDUCIAL-0.2MM]  99.7,48.64 0 top
FD128  FIDUCIAL0.2MM  [FIDUCIAL-0.2MM]  99.7,48.64 0 bottom
FD129  FIDUCIAL0.2MM  [FIDUCIAL-0.2MM]  19.05,50.04 0 top
FD130  FIDUCIAL0.2MM  [FIDUCIAL-0.2MM]  19.05,50.04 0 bottom
FD131  FIDUCIAL0.2MM  [FIDUCIAL-0.2MM]  7.24,59.31 0 top
FD132  FIDUCIAL0.2MM  [FIDUCIAL-0.2MM]  7.24,59.31 0 bottom
FD133  FIDUCIAL0.2MM  [FIDUCIAL-0.2MM]  32.26,50.04 0 top
FD134  FIDUCIAL0.2MM  [FIDUCIAL-0.2MM]  32.26,50.04 0 bottom
FD135  FIDUCIAL0.2MM  [FIDUCIAL-0.2MM]  20.45,59.31 0 top
FD136  FIDUCIAL0.2MM  [FIDUCIAL-0.2MM]  20.45,59.31 0 bottom
FD137  FIDUCIAL0.2MM  [FIDUCIAL-0.2MM]  45.47,50.04 0 top
FD138  FIDUCIAL0.2MM  [FIDUCIAL-0.2MM]  45.47,50.04 0 bottom
FD139  FIDUCIAL0.2MM  [FIDUCIAL-0.2MM]  33.66,59.31 0 top
FD140  FIDUCIAL0.2MM  [FIDUCIAL-0.2MM]  33.66,59.31 0 bottom
FD141  FIDUCIAL0.2MM  [FIDUCIAL-0.2MM]  58.67,50.04 0 top
FD142  FIDUCIAL0.2MM  [FIDUCIAL-0.2MM]  58.67,50.04 0 bottom
FD143  FIDUCIAL0.2MM  [FIDUCIAL-0.2MM]  46.86,59.31 0 top
FD144  FIDUCIAL0.2MM  [FIDUCIAL-0.2MM]  46.86,59.31 0 bottom
FD145  FIDUCIAL0.2MM  [FIDUCIAL-0.2MM]  71.88,50.04 0 top
FD146  FIDUCIAL0.2MM  [FIDUCIAL-0.2MM]  71.88,50.04 0 bottom
FD147  FIDUCIAL0.2MM  [FIDUCIAL-0.2MM]  60.07,59.31 0 top
FD148  FIDUCIAL0.2MM  [FIDUCIAL-0.2MM]  60.07,59.31 0 bottom
FD149  FIDUCIAL0.2MM  [FIDUCIAL-0.2MM]  85.09,50.04 0 top
FD150  FIDUCIAL0.2MM  [FIDUCIAL-0.2MM]  85.09,50.04 0 bottom
FD151  FIDUCIAL0.2MM  [FIDUCIAL-0.2MM]  73.28,59.31 0 top
FD152  FIDUCIAL0.2MM  [FIDUCIAL-0.2MM]  73.28,59.31 0 bottom
FD153  FIDUCIAL0.2MM  [FIDUCIAL-0.2MM]  98.3,50.04 0 top
FD154  FIDUCIAL0.2MM  [FIDUCIAL-0.2MM]  98.3,50.04 0 bottom
FD155  FIDUCIAL0.2MM  [FIDUCIAL-0.2MM]  86.49,59.31 0 top
FD156  FIDUCIAL0.2MM  [FIDUCIAL-0.2MM]  86.49,59.31 0 bottom
FD157  FIDUCIAL0.2MM  [FIDUCIAL-0.2MM]  111.51,50.04 0 top
FD158  FIDUCIAL0.2MM  [FIDUCIAL-0.2MM]  111.51,50.04 0 bottom
FD159  FIDUCIAL0.2MM  [FIDUCIAL-0.2MM]  99.7,59.31 0 top
FD160  FIDUCIAL0.2MM  [FIDUCIAL-0.2MM]  99.7,59.31 0 bottom
FD161  FIDUCIAL0.2MM  [FIDUCIAL-0.2MM]  19.05,60.71 0 top
FD162  FIDUCIAL0.2MM  [FIDUCIAL-0.2MM]  19.05,60.71 0 bottom
FD163  FIDUCIAL0.2MM  [FIDUCIAL-0.2MM]  7.24,69.98 0 top
FD164  FIDUCIAL0.2MM  [FIDUCIAL-0.2MM]  7.24,69.98 0 bottom
FD165  FIDUCIAL0.2MM  [FIDUCIAL-0.2MM]  32.26,60.71 0 top
FD166  FIDUCIAL0.2MM  [FIDUCIAL-0.2MM]  32.26,60.71 0 bottom
FD167  FIDUCIAL0.2MM  [FIDUCIAL-0.2MM]  20.45,69.98 0 top
FD168  FIDUCIAL0.2MM  [FIDUCIAL-0.2MM]  20.45,69.98 0 bottom
FD169  FIDUCIAL0.2MM  [FIDUCIAL-0.2MM]  45.47,60.71 0 top
FD170  FIDUCIAL0.2MM  [FIDUCIAL-0.2MM]  45.47,60.71 0 bottom
FD171  FIDUCIAL0.2MM  [FIDUCIAL-0.2MM]  33.66,69.98 0 top
FD172  FIDUCIAL0.2MM  [FIDUCIAL-0.2MM]  33.66,69.98 0 bottom
FD173  FIDUCIAL0.2MM  [FIDUCIAL-0.2MM]  58.67,60.71 0 top
FD174  FIDUCIAL0.2MM  [FIDUCIAL-0.2MM]  58.67,60.71 0 bottom
FD175  FIDUCIAL0.2MM  [FIDUCIAL-0.2MM]  46.86,69.98 0 top
FD176  FIDUCIAL0.2MM  [FIDUCIAL-0.2MM]  46.86,69.98 0 bottom
FD177  FIDUCIAL0.2MM  [FIDUCIAL-0.2MM]  71.88,60.71 0 top
FD178  FIDUCIAL0.2MM  [FIDUCIAL-0.2MM]  71.88,60.71 0 bottom
FD179  FIDUCIAL0.2MM  [FIDUCIAL-0.2MM]  60.07,69.98 0 top
FD180  FIDUCIAL0.2MM  [FIDUCIAL-0.2MM]  60.07,69.98 0 bottom
FD181  FIDUCIAL0.2MM  [FIDUCIAL-0.2MM]  85.09,60.71 0 top
FD182  FIDUCIAL0.2MM  [FIDUCIAL-0.2MM]  85.09,60.71 0 bottom
FD183  FIDUCIAL0.2MM  [FIDUCIAL-0.2MM]  73.28,69.98 0 top
FD184  FIDUCIAL0.2MM  [FIDUCIAL-0.2MM]  73.28,69.98 0 bottom
FD185  FIDUCIAL0.2MM  [FIDUCIAL-0.2MM]  98.3,60.71 0 top
FD186  FIDUCIAL0.2MM  [FIDUCIAL-0.2MM]  98.3,60.71 0 bottom
FD187  FIDUCIAL0.2MM  [FIDUCIAL-0.2MM]  86.49,69.98 0 top
FD188  FIDUCIAL0.2MM  [FIDUCIAL-0.2MM]  86.49,69.98 0 bottom
FD189  FIDUCIAL0.2MM  [FIDUCIAL-0.2MM]  111.51,60.71 0 top
FD190  FIDUCIAL0.2MM  [FIDUCIAL-0.2MM]  111.51,60.71 0 bottom
FD191  FIDUCIAL0.2MM  [FIDUCIAL-0.2MM]  99.7,69.98 0 top
FD192  FIDUCIAL0.2MM  [FIDUCIAL-0.2MM]  99.7,69.98 0 bottom
FD193  FIDUCIAL0.2MM  [FIDUCIAL-0.2MM]  19.05,71.37 0 top
FD194  FIDUCIAL0.2MM  [FIDUCIAL-0.2MM]  19.05,71.37 0 bottom
FD195  FIDUCIAL0.2MM  [FIDUCIAL-0.2MM]  7.24,80.65 0 top
FD196  FIDUCIAL0.2MM  [FIDUCIAL-0.2MM]  7.24,80.65 0 bottom
FD197  FIDUCIAL0.2MM  [FIDUCIAL-0.2MM]  32.26,71.37 0 top
FD198  FIDUCIAL0.2MM  [FIDUCIAL-0.2MM]  32.26,71.37 0 bottom
FD199  FIDUCIAL0.2MM  [FIDUCIAL-0.2MM]  20.45,80.65 0 top
FD200  FIDUCIAL0.2MM  [FIDUCIAL-0.2MM]  20.45,80.65 0 bottom
FD201  FIDUCIAL0.2MM  [FIDUCIAL-0.2MM]  45.47,71.37 0 top
FD202  FIDUCIAL0.2MM  [FIDUCIAL-0.2MM]  45.47,71.37 0 bottom
FD203  FIDUCIAL0.2MM  [FIDUCIAL-0.2MM]  33.66,80.65 0 top
FD204  FIDUCIAL0.2MM  [FIDUCIAL-0.2MM]  33.66,80.65 0 bottom
FD205  FIDUCIAL0.2MM  [FIDUCIAL-0.2MM]  58.67,71.37 0 top
FD206  FIDUCIAL0.2MM  [FIDUCIAL-0.2MM]  58.67,71.37 0 bottom
FD207  FIDUCIAL0.2MM  [FIDUCIAL-0.2MM]  46.86,80.65 0 top
FD208  FIDUCIAL0.2MM  [FIDUCIAL-0.2MM]  46.86,80.65 0 bottom
FD209  FIDUCIAL0.2MM  [FIDUCIAL-0.2MM]  71.88,71.37 0 top
FD210  FIDUCIAL0.2MM  [FIDUCIAL-0.2MM]  71.88,71.37 0 bottom
FD211  FIDUCIAL0.2MM  [FIDUCIAL-0.2MM]  60.07,80.65 0 top
FD212  FIDUCIAL0.2MM  [FIDUCIAL-0.2MM]  60.07,80.65 0 bottom
FD213  FIDUCIAL0.2MM  [FIDUCIAL-0.2MM]  85.09,71.37 0 top
FD214  FIDUCIAL0.2MM  [FIDUCIAL-0.2MM]  85.09,71.37 0 bottom
FD215  FIDUCIAL0.2MM  [FIDUCIAL-0.2MM]  73.28,80.65 0 top
FD216  FIDUCIAL0.2MM  [FIDUCIAL-0.2MM]  73.28,80.65 0 bottom
FD217  FIDUCIAL0.2MM  [FIDUCIAL-0.2MM]  98.3,71.37 0 top
FD218  FIDUCIAL0.2MM  [FIDUCIAL-0.2MM]  98.3,71.37 0 bottom
FD219  FIDUCIAL0.2MM  [FIDUCIAL-0.2MM]  86.49,80.65 0 top
FD220  FIDUCIAL0.2MM  [FIDUCIAL-0.2MM]  86.49,80.65 0 bottom
FD221  FIDUCIAL0.2MM  [FIDUCIAL-0.2MM]  111.51,71.37 0 top
FD222  FIDUCIAL0.2MM  [FIDUCIAL-0.2MM]  111.51,71.37 0 bottom
FD223  FIDUCIAL0.2MM  [FIDUCIAL-0.2MM]  99.7,80.65 0 top
FD224  FIDUCIAL0.2MM  [FIDUCIAL-0.2MM]  99.7,80.65 0 bottom
FD225  FIDUCIAL0.2MM  [FIDUCIAL-0.2MM]  19.05,82.04 0 top
FD226  FIDUCIAL0.2MM  [FIDUCIAL-0.2MM]  19.05,82.04 0 bottom
FD227  FIDUCIAL0.2MM  [FIDUCIAL-0.2MM]  7.24,91.31 0 top
FD228  FIDUCIAL0.2MM  [FIDUCIAL-0.2MM]  7.24,91.31 0 bottom
FD229  FIDUCIAL0.2MM  [FIDUCIAL-0.2MM]  32.26,82.04 0 top
FD230  FIDUCIAL0.2MM  [FIDUCIAL-0.2MM]  32.26,82.04 0 bottom
FD231  FIDUCIAL0.2MM  [FIDUCIAL-0.2MM]  20.45,91.31 0 top
FD232  FIDUCIAL0.2MM  [FIDUCIAL-0.2MM]  20.45,91.31 0 bottom
FD233  FIDUCIAL0.2MM  [FIDUCIAL-0.2MM]  45.47,82.04 0 top
FD234  FIDUCIAL0.2MM  [FIDUCIAL-0.2MM]  45.47,82.04 0 bottom
FD235  FIDUCIAL0.2MM  [FIDUCIAL-0.2MM]  33.66,91.31 0 top
FD236  FIDUCIAL0.2MM  [FIDUCIAL-0.2MM]  33.66,91.31 0 bottom
FD237  FIDUCIAL0.2MM  [FIDUCIAL-0.2MM]  58.67,82.04 0 top
FD238  FIDUCIAL0.2MM  [FIDUCIAL-0.2MM]  58.67,82.04 0 bottom
FD239  FIDUCIAL0.2MM  [FIDUCIAL-0.2MM]  46.86,91.31 0 top
FD240  FIDUCIAL0.2MM  [FIDUCIAL-0.2MM]  46.86,91.31 0 bottom
FD241  FIDUCIAL0.2MM  [FIDUCIAL-0.2MM]  71.88,82.04 0 top
FD242  FIDUCIAL0.2MM  [FIDUCIAL-0.2MM]  71.88,82.04 0 bottom
FD243  FIDUCIAL0.2MM  [FIDUCIAL-0.2MM]  60.07,91.31 0 top
FD244  FIDUCIAL0.2MM  [FIDUCIAL-0.2MM]  60.07,91.31 0 bottom
FD245  FIDUCIAL0.2MM  [FIDUCIAL-0.2MM]  85.09,82.04 0 top
FD246  FIDUCIAL0.2MM  [FIDUCIAL-0.2MM]  85.09,82.04 0 bottom
FD247  FIDUCIAL0.2MM  [FIDUCIAL-0.2MM]  73.28,91.31 0 top
FD248  FIDUCIAL0.2MM  [FIDUCIAL-0.2MM]  73.28,91.31 0 bottom
FD249  FIDUCIAL0.2MM  [FIDUCIAL-0.2MM]  98.3,82.04 0 top
FD250  FIDUCIAL0.2MM  [FIDUCIAL-0.2MM]  98.3,82.04 0 bottom
FD251  FIDUCIAL0.2MM  [FIDUCIAL-0.2MM]  86.49,91.31 0 top
FD252  FIDUCIAL0.2MM  [FIDUCIAL-0.2MM]  86.49,91.31 0 bottom
FD253  FIDUCIAL0.2MM  [FIDUCIAL-0.2MM]  111.51,82.04 0 top
FD254  FIDUCIAL0.2MM  [FIDUCIAL-0.2MM]  111.51,82.04 0 bottom
FD255  FIDUCIAL0.2MM  [FIDUCIAL-0.2MM]  99.7,91.31 0 top
FD256  FIDUCIAL0.2MM  [FIDUCIAL-0.2MM]  99.7,91.31 0 bottom
FD257  FIDUCIAL0.2MM  [FIDUCIAL-0.2MM]  19.05,92.71 0 top
FD258  FIDUCIAL0.2MM  [FIDUCIAL-0.2MM]  19.05,92.71 0 bottom
FD259  FIDUCIAL0.2MM  [FIDUCIAL-0.2MM]  7.24,101.98 0 top
FD260  FIDUCIAL0.2MM  [FIDUCIAL-0.2MM]  7.24,101.98 0 bottom
FD261  FIDUCIAL0.2MM  [FIDUCIAL-0.2MM]  32.26,92.71 0 top
FD262  FIDUCIAL0.2MM  [FIDUCIAL-0.2MM]  32.26,92.71 0 bottom
FD263  FIDUCIAL0.2MM  [FIDUCIAL-0.2MM]  20.45,101.98 0 top
FD264  FIDUCIAL0.2MM  [FIDUCIAL-0.2MM]  20.45,101.98 0 bottom
FD265  FIDUCIAL0.2MM  [FIDUCIAL-0.2MM]  45.47,92.71 0 top
FD266  FIDUCIAL0.2MM  [FIDUCIAL-0.2MM]  45.47,92.71 0 bottom
FD267  FIDUCIAL0.2MM  [FIDUCIAL-0.2MM]  33.66,101.98 0 top
FD268  FIDUCIAL0.2MM  [FIDUCIAL-0.2MM]  33.66,101.98 0 bottom
FD269  FIDUCIAL0.2MM  [FIDUCIAL-0.2MM]  58.67,92.71 0 top
FD270  FIDUCIAL0.2MM  [FIDUCIAL-0.2MM]  58.67,92.71 0 bottom
FD271  FIDUCIAL0.2MM  [FIDUCIAL-0.2MM]  46.86,101.98 0 top
FD272  FIDUCIAL0.2MM  [FIDUCIAL-0.2MM]  46.86,101.98 0 bottom
FD273  FIDUCIAL0.2MM  [FIDUCIAL-0.2MM]  71.88,92.71 0 top
FD274  FIDUCIAL0.2MM  [FIDUCIAL-0.2MM]  71.88,92.71 0 bottom
FD275  FIDUCIAL0.2MM  [FIDUCIAL-0.2MM]  60.07,101.98 0 top
FD276  FIDUCIAL0.2MM  [FIDUCIAL-0.2MM]  60.07,101.98 0 bottom
FD277  FIDUCIAL0.2MM  [FIDUCIAL-0.2MM]  85.09,92.71 0 top
FD278  FIDUCIAL0.2MM  [FIDUCIAL-0.2MM]  85.09,92.71 0 bottom
FD279  FIDUCIAL0.2MM  [FIDUCIAL-0.2MM]  73.28,101.98 0 top
FD280  FIDUCIAL0.2MM  [FIDUCIAL-0.2MM]  73.28,101.98 0 bottom
FD281  FIDUCIAL0.2MM  [FIDUCIAL-0.2MM]  98.3,92.71 0 top
FD282  FIDUCIAL0.2MM  [FIDUCIAL-0.2MM]  98.3,92.71 0 bottom
FD283  FIDUCIAL0.2MM  [FIDUCIAL-0.2MM]  86.49,101.98 0 top
FD284  FIDUCIAL0.2MM  [FIDUCIAL-0.2MM]  86.49,101.98 0 bottom
FD285  FIDUCIAL0.2MM  [FIDUCIAL-0.2MM]  111.51,92.71 0 top
FD286  FIDUCIAL0.2MM  [FIDUCIAL-0.2MM]  111.51,92.71 0 bottom
FD287  FIDUCIAL0.2MM  [FIDUCIAL-0.2MM]  99.7,101.98 0 top
FD288  FIDUCIAL0.2MM  [FIDUCIAL-0.2MM]  99.7,101.98 0 bottom
FD289  FIDUCIAL0.2MM  [FIDUCIAL-0.2MM]  19.05,103.38 0 top
FD290  FIDUCIAL0.2MM  [FIDUCIAL-0.2MM]  19.05,103.38 0 bottom
FD291  FIDUCIAL0.2MM  [FIDUCIAL-0.2MM]  7.24,112.65 0 top
FD292  FIDUCIAL0.2MM  [FIDUCIAL-0.2MM]  7.24,112.65 0 bottom
FD293  FIDUCIAL0.2MM  [FIDUCIAL-0.2MM]  32.26,103.38 0 top
FD294  FIDUCIAL0.2MM  [FIDUCIAL-0.2MM]  32.26,103.38 0 bottom
FD295  FIDUCIAL0.2MM  [FIDUCIAL-0.2MM]  20.45,112.65 0 top
FD296  FIDUCIAL0.2MM  [FIDUCIAL-0.2MM]  20.45,112.65 0 bottom
FD297  FIDUCIAL0.2MM  [FIDUCIAL-0.2MM]  45.47,103.38 0 top
FD298  FIDUCIAL0.2MM  [FIDUCIAL-0.2MM]  45.47,103.38 0 bottom
FD299  FIDUCIAL0.2MM  [FIDUCIAL-0.2MM]  33.66,112.65 0 top
FD300  FIDUCIAL0.2MM  [FIDUCIAL-0.2MM]  33.66,112.65 0 bottom
FD301  FIDUCIAL0.2MM  [FIDUCIAL-0.2MM]  58.67,103.38 0 top
FD302  FIDUCIAL0.2MM  [FIDUCIAL-0.2MM]  58.67,103.38 0 bottom
FD303  FIDUCIAL0.2MM  [FIDUCIAL-0.2MM]  46.86,112.65 0 top
FD304  FIDUCIAL0.2MM  [FIDUCIAL-0.2MM]  46.86,112.65 0 bottom
FD305  FIDUCIAL0.2MM  [FIDUCIAL-0.2MM]  71.88,103.38 0 top
FD306  FIDUCIAL0.2MM  [FIDUCIAL-0.2MM]  71.88,103.38 0 bottom
FD307  FIDUCIAL0.2MM  [FIDUCIAL-0.2MM]  60.07,112.65 0 top
FD308  FIDUCIAL0.2MM  [FIDUCIAL-0.2MM]  60.07,112.65 0 bottom
FD309  FIDUCIAL0.2MM  [FIDUCIAL-0.2MM]  85.09,103.38 0 top
FD310  FIDUCIAL0.2MM  [FIDUCIAL-0.2MM]  85.09,103.38 0 bottom
FD311  FIDUCIAL0.2MM  [FIDUCIAL-0.2MM]  73.28,112.65 0 top
FD312  FIDUCIAL0.2MM  [FIDUCIAL-0.2MM]  73.28,112.65 0 bottom
FD313  FIDUCIAL0.2MM  [FIDUCIAL-0.2MM]  98.3,103.38 0 top
FD314  FIDUCIAL0.2MM  [FIDUCIAL-0.2MM]  98.3,103.38 0 bottom
FD315  FIDUCIAL0.2MM  [FIDUCIAL-0.2MM]  86.49,112.65 0 top
FD316  FIDUCIAL0.2MM  [FIDUCIAL-0.2MM]  86.49,112.65 0 bottom
FD317  FIDUCIAL0.2MM  [FIDUCIAL-0.2MM]  111.51,103.38 0 top
FD318  FIDUCIAL0.2MM  [FIDUCIAL-0.2MM]  111.51,103.38 0 bottom
FD319  FIDUCIAL0.2MM  [FIDUCIAL-0.2MM]  99.7,112.65 0 top
FD320  FIDUCIAL0.2MM  [FIDUCIAL-0.2MM]  99.7,112.65 0 bottom
FD321  FIDUCIAL0.2MM  [FIDUCIAL-0.2MM]  19.05,114.05 0 top
FD322  FIDUCIAL0.2MM  [FIDUCIAL-0.2MM]  19.05,114.05 0 bottom
FD323  FIDUCIAL0.2MM  [FIDUCIAL-0.2MM]  7.24,123.32 0 top
FD324  FIDUCIAL0.2MM  [FIDUCIAL-0.2MM]  7.24,123.32 0 bottom
FD325  FIDUCIAL0.2MM  [FIDUCIAL-0.2MM]  32.26,114.05 0 top
FD326  FIDUCIAL0.2MM  [FIDUCIAL-0.2MM]  32.26,114.05 0 bottom
FD327  FIDUCIAL0.2MM  [FIDUCIAL-0.2MM]  20.45,123.32 0 top
FD328  FIDUCIAL0.2MM  [FIDUCIAL-0.2MM]  20.45,123.32 0 bottom
FD329  FIDUCIAL0.2MM  [FIDUCIAL-0.2MM]  45.47,114.05 0 top
FD330  FIDUCIAL0.2MM  [FIDUCIAL-0.2MM]  45.47,114.05 0 bottom
FD331  FIDUCIAL0.2MM  [FIDUCIAL-0.2MM]  33.66,123.32 0 top
FD332  FIDUCIAL0.2MM  [FIDUCIAL-0.2MM]  33.66,123.32 0 bottom
FD333  FIDUCIAL0.2MM  [FIDUCIAL-0.2MM]  58.67,114.05 0 top
FD334  FIDUCIAL0.2MM  [FIDUCIAL-0.2MM]  58.67,114.05 0 bottom
FD335  FIDUCIAL0.2MM  [FIDUCIAL-0.2MM]  46.86,123.32 0 top
FD336  FIDUCIAL0.2MM  [FIDUCIAL-0.2MM]  46.86,123.32 0 bottom
FD337  FIDUCIAL0.2MM  [FIDUCIAL-0.2MM]  71.88,114.05 0 top
FD338  FIDUCIAL0.2MM  [FIDUCIAL-0.2MM]  71.88,114.05 0 bottom
FD339  FIDUCIAL0.2MM  [FIDUCIAL-0.2MM]  60.07,123.32 0 top
FD340  FIDUCIAL0.2MM  [FIDUCIAL-0.2MM]  60.07,123.32 0 bottom
FD341  FIDUCIAL0.2MM  [FIDUCIAL-0.2MM]  85.09,114.05 0 top
FD342  FIDUCIAL0.2MM  [FIDUCIAL-0.2MM]  85.09,114.05 0 bottom
FD343  FIDUCIAL0.2MM  [FIDUCIAL-0.2MM]  73.28,123.32 0 top
FD344  FIDUCIAL0.2MM  [FIDUCIAL-0.2MM]  73.28,123.32 0 bottom
FD345  FIDUCIAL0.2MM  [FIDUCIAL-0.2MM]  98.3,114.05 0 top
FD346  FIDUCIAL0.2MM  [FIDUCIAL-0.2MM]  98.3,114.05 0 bottom
FD347  FIDUCIAL0.2MM  [FIDUCIAL-0.2MM]  86.49,123.32 0 top
FD348  FIDUCIAL0.2MM  [FIDUCIAL-0.2MM]  86.49,123.32 0 bottom
FD349  FIDUCIAL0.2MM  [FIDUCIAL-0.2MM]  111.51,114.05 0 top
FD350  FIDUCIAL0.2MM  [FIDUCIAL-0.2MM]  111.51,114.05 0 bottom
FD351  FIDUCIAL0.2MM  [FIDUCIAL-0.2MM]  99.7,123.32 0 top
FD352  FIDUCIAL0.2MM  [FIDUCIAL-0.2MM]  99.7,123.32 0 bottom
FD353  FIDUCIAL0.2MM  [FIDUCIAL-0.2MM]  19.05,124.71 0 top
FD354  FIDUCIAL0.2MM  [FIDUCIAL-0.2MM]  19.05,124.71 0 bottom
FD355  FIDUCIAL0.2MM  [FIDUCIAL-0.2MM]  7.24,133.98 0 top
FD356  FIDUCIAL0.2MM  [FIDUCIAL-0.2MM]  7.24,133.98 0 bottom
FD357  FIDUCIAL0.2MM  [FIDUCIAL-0.2MM]  32.26,124.71 0 top
FD358  FIDUCIAL0.2MM  [FIDUCIAL-0.2MM]  32.26,124.71 0 bottom
FD359  FIDUCIAL0.2MM  [FIDUCIAL-0.2MM]  20.45,133.98 0 top
FD360  FIDUCIAL0.2MM  [FIDUCIAL-0.2MM]  20.45,133.98 0 bottom
FD361  FIDUCIAL0.2MM  [FIDUCIAL-0.2MM]  45.47,124.71 0 top
FD362  FIDUCIAL0.2MM  [FIDUCIAL-0.2MM]  45.47,124.71 0 bottom
FD363  FIDUCIAL0.2MM  [FIDUCIAL-0.2MM]  33.66,133.98 0 top
FD364  FIDUCIAL0.2MM  [FIDUCIAL-0.2MM]  33.66,133.98 0 bottom
FD365  FIDUCIAL0.2MM  [FIDUCIAL-0.2MM]  58.67,124.71 0 top
FD366  FIDUCIAL0.2MM  [FIDUCIAL-0.2MM]  58.67,124.71 0 bottom
FD367  FIDUCIAL0.2MM  [FIDUCIAL-0.2MM]  46.86,133.98 0 top
FD368  FIDUCIAL0.2MM  [FIDUCIAL-0.2MM]  46.86,133.98 0 bottom
FD369  FIDUCIAL0.2MM  [FIDUCIAL-0.2MM]  71.88,124.71 0 top
FD370  FIDUCIAL0.2MM  [FIDUCIAL-0.2MM]  71.88,124.71 0 bottom
FD371  FIDUCIAL0.2MM  [FIDUCIAL-0.2MM]  60.07,133.98 0 top
FD372  FIDUCIAL0.2MM  [FIDUCIAL-0.2MM]  60.07,133.98 0 bottom
FD373  FIDUCIAL0.2MM  [FIDUCIAL-0.2MM]  85.09,124.71 0 top
FD374  FIDUCIAL0.2MM  [FIDUCIAL-0.2MM]  85.09,124.71 0 bottom
FD375  FIDUCIAL0.2MM  [FIDUCIAL-0.2MM]  73.28,133.98 0 top
FD376  FIDUCIAL0.2MM  [FIDUCIAL-0.2MM]  73.28,133.98 0 bottom
FD377  FIDUCIAL0.2MM  [FIDUCIAL-0.2MM]  98.3,124.71 0 top
FD378  FIDUCIAL0.2MM  [FIDUCIAL-0.2MM]  98.3,124.71 0 bottom
FD379  FIDUCIAL0.2MM  [FIDUCIAL-0.2MM]  86.49,133.98 0 top
FD380  FIDUCIAL0.2MM  [FIDUCIAL-0.2MM]  86.49,133.98 0 bottom
FD381  FIDUCIAL0.2MM  [FIDUCIAL-0.2MM]  111.51,124.71 0 top
FD382  FIDUCIAL0.2MM  [FIDUCIAL-0.2MM]  111.51,124.71 0 bottom
FD383  FIDUCIAL0.2MM  [FIDUCIAL-0.2MM]  99.7,133.98 0 top
FD384  FIDUCIAL0.2MM  [FIDUCIAL-0.2MM]  99.7,133.98 0 bottom
FD385  FIDUCIAL0.2MM  [FIDUCIAL-0.2MM]  19.05,135.38 0 top
FD386  FIDUCIAL0.2MM  [FIDUCIAL-0.2MM]  19.05,135.38 0 bottom
FD387  FIDUCIAL0.2MM  [FIDUCIAL-0.2MM]  7.24,144.65 0 top
FD388  FIDUCIAL0.2MM  [FIDUCIAL-0.2MM]  7.24,144.65 0 bottom
FD389  FIDUCIAL0.2MM  [FIDUCIAL-0.2MM]  32.26,135.38 0 top
FD390  FIDUCIAL0.2MM  [FIDUCIAL-0.2MM]  32.26,135.38 0 bottom
FD391  FIDUCIAL0.2MM  [FIDUCIAL-0.2MM]  20.45,144.65 0 top
FD392  FIDUCIAL0.2MM  [FIDUCIAL-0.2MM]  20.45,144.65 0 bottom
FD393  FIDUCIAL0.2MM  [FIDUCIAL-0.2MM]  45.47,135.38 0 top
FD394  FIDUCIAL0.2MM  [FIDUCIAL-0.2MM]  45.47,135.38 0 bottom
FD395  FIDUCIAL0.2MM  [FIDUCIAL-0.2MM]  33.66,144.65 0 top
FD396  FIDUCIAL0.2MM  [FIDUCIAL-0.2MM]  33.66,144.65 0 bottom
FD397  FIDUCIAL0.2MM  [FIDUCIAL-0.2MM]  58.67,135.38 0 top
FD398  FIDUCIAL0.2MM  [FIDUCIAL-0.2MM]  58.67,135.38 0 bottom
FD399  FIDUCIAL0.2MM  [FIDUCIAL-0.2MM]  46.86,144.65 0 top
FD400  FIDUCIAL0.2MM  [FIDUCIAL-0.2MM]  46.86,144.65 0 bottom
FD401  FIDUCIAL0.2MM  [FIDUCIAL-0.2MM]  71.88,135.38 0 top
FD402  FIDUCIAL0.2MM  [FIDUCIAL-0.2MM]  71.88,135.38 0 bottom
FD403  FIDUCIAL0.2MM  [FIDUCIAL-0.2MM]  60.07,144.65 0 top
FD404  FIDUCIAL0.2MM  [FIDUCIAL-0.2MM]  60.07,144.65 0 bottom
FD405  FIDUCIAL0.2MM  [FIDUCIAL-0.2MM]  85.09,135.38 0 top
FD406  FIDUCIAL0.2MM  [FIDUCIAL-0.2MM]  85.09,135.38 0 bottom
FD407  FIDUCIAL0.2MM  [FIDUCIAL-0.2MM]  73.28,144.65 0 top
FD408  FIDUCIAL0.2MM  [FIDUCIAL-0.2MM]  73.28,144.65 0 bottom
FD409  FIDUCIAL0.2MM  [FIDUCIAL-0.2MM]  98.3,135.38 0 top
FD410  FIDUCIAL0.2MM  [FIDUCIAL-0.2MM]  98.3,135.38 0 bottom
FD411  FIDUCIAL0.2MM  [FIDUCIAL-0.2MM]  86.49,144.65 0 top
FD412  FIDUCIAL0.2MM  [FIDUCIAL-0.2MM]  86.49,144.65 0 bottom
FD413  FIDUCIAL0.2MM  [FIDUCIAL-0.2MM]  111.51,135.38 0 top
FD414  FIDUCIAL0.2MM  [FIDUCIAL-0.2MM]  111.51,135.38 0 bottom
FD415  FIDUCIAL0.2MM  [FIDUCIAL-0.2MM]  99.7,144.65 0 top
FD416  FIDUCIAL0.2MM  [FIDUCIAL-0.2MM]  99.7,144.65 0 bottom
J1  [1X04_NO_SILK]  8.13,15.75 270 top
J2  [1X04_NO_SILK]  21.34,15.75 270 top
J3  [1X04_NO_SILK]  34.54,15.75 270 top
J4  [1X04_NO_SILK]  47.75,15.75 270 top
J5  [1X04_NO_SILK]  60.96,15.75 270 top
J6  [1X04_NO_SILK]  74.17,15.75 270 top
J7  [1X04_NO_SILK]  87.38,15.75 270 top
J8  [1X04_NO_SILK]  100.58,15.75 270 top
J9  [1X04_NO_SILK]  8.13,26.42 270 top
J10  [1X04_NO_SILK]  21.34,26.42 270 top
J11  [1X04_NO_SILK]  34.54,26.42 270 top
J12  [1X04_NO_SILK]  47.75,26.42 270 top
J13  [1X04_NO_SILK]  60.96,26.42 270 top
J14  [1X04_NO_SILK]  74.17,26.42 270 top
J15  [1X04_NO_SILK]  87.38,26.42 270 top
J16  [1X04_NO_SILK]  100.58,26.42 270 top
J17  [1X04_NO_SILK]  8.13,37.08 270 top
J18  [1X04_NO_SILK]  21.34,37.08 270 top
J19  [1X04_NO_SILK]  34.54,37.08 270 top
J20  [1X04_NO_SILK]  47.75,37.08 270 top
J21  [1X04_NO_SILK]  60.96,37.08 270 top
J22  [1X04_NO_SILK]  74.17,37.08 270 top
J23  [1X04_NO_SILK]  87.38,37.08 270 top
J24  [1X04_NO_SILK]  100.58,37.08 270 top
J25  [1X04_NO_SILK]  8.13,47.75 270 top
J26  [1X04_NO_SILK]  21.34,47.75 270 top
J27  [1X04_NO_SILK]  34.54,47.75 270 top
J28  [1X04_NO_SILK]  47.75,47.75 270 top
J29  [1X04_NO_SILK]  60.96,47.75 270 top
J30  [1X04_NO_SILK]  74.17,47.75 270 top
J31  [1X04_NO_SILK]  87.38,47.75 270 top
J32  [1X04_NO_SILK]  100.58,47.75 270 top
J33  [1X04_NO_SILK]  8.13,58.42 270 top
J34  [1X04_NO_SILK]  21.34,58.42 270 top
J35  [1X04_NO_SILK]  34.54,58.42 270 top
J36  [1X04_NO_SILK]  47.75,58.42 270 top
J37  [1X04_NO_SILK]  60.96,58.42 270 top
J38  [1X04_NO_SILK]  74.17,58.42 270 top
J39  [1X04_NO_SILK]  87.38,58.42 270 top
J40  [1X04_NO_SILK]  100.58,58.42 270 top
J41  [1X04_NO_SILK]  8.13,69.09 270 top
J42  [1X04_NO_SILK]  21.34,69.09 270 top
J43  [1X04_NO_SILK]  34.54,69.09 270 top
J44  [1X04_NO_SILK]  47.75,69.09 270 top
J45  [1X04_NO_SILK]  60.96,69.09 270 top
J46  [1X04_NO_SILK]  74.17,69.09 270 top
J47  [1X04_NO_SILK]  87.38,69.09 270 top
J48  [1X04_NO_SILK]  100.58,69.09 270 top
J49  [1X04_NO_SILK]  8.13,79.76 270 top
J50  [1X04_NO_SILK]  21.34,79.76 270 top
J51  [1X04_NO_SILK]  34.54,79.76 270 top
J52  [1X04_NO_SILK]  47.75,79.76 270 top
J53  [1X04_NO_SILK]  60.96,79.76 270 top
J54  [1X04_NO_SILK]  74.17,79.76 270 top
J55  [1X04_NO_SILK]  87.38,79.76 270 top
J56  [1X04_NO_SILK]  100.58,79.76 270 top
J57  [1X04_NO_SILK]  8.13,90.42 270 top
J58  [1X04_NO_SILK]  21.34,90.42 270 top
J59  [1X04_NO_SILK]  34.54,90.42 270 top
J60  [1X04_NO_SILK]  47.75,90.42 270 top
J61  [1X04_NO_SILK]  60.96,90.42 270 top
J62  [1X04_NO_SILK]  74.17,90.42 270 top
J63  [1X04_NO_SILK]  87.38,90.42 270 top
J64  [1X04_NO_SILK]  100.58,90.42 270 top
J65  [1X04_NO_SILK]  8.13,101.09 270 top
J66  [1X04_NO_SILK]  21.34,101.09 270 top
J67  [1X04_NO_SILK]  34.54,101.09 270 top
J68  [1X04_NO_SILK]  47.75,101.09 270 top
J69  [1X04_NO_SILK]  60.96,101.09 270 top
J70  [1X04_NO_SILK]  74.17,101.09 270 top
J71  [1X04_NO_SILK]  87.38,101.09 270 top
J72  [1X04_NO_SILK]  100.58,101.09 270 top
J73  [1X04_NO_SILK]  8.13,111.76 270 top
J74  [1X04_NO_SILK]  21.34,111.76 270 top
J75  [1X04_NO_SILK]  34.54,111.76 270 top
J76  [1X04_NO_SILK]  47.75,111.76 270 top
J77  [1X04_NO_SILK]  60.96,111.76 270 top
J78  [1X04_NO_SILK]  74.17,111.76 270 top
J79  [1X04_NO_SILK]  87.38,111.76 270 top
J80  [1X04_NO_SILK]  100.58,111.76 270 top
J81  [1X04_NO_SILK]  8.13,122.43 270 top
J82  [1X04_NO_SILK]  21.34,122.43 270 top
J83  [1X04_NO_SILK]  34.54,122.43 270 top
J84  [1X04_NO_SILK]  47.75,122.43 270 top
J85  [1X04_NO_SILK]  60.96,122.43 270 top
J86  [1X04_NO_SILK]  74.17,122.43 270 top
J87  [1X04_NO_SILK]  87.38,122.43 270 top
J88  [1X04_NO_SILK]  100.58,122.43 270 top
J89  [1X04_NO_SILK]  8.13,133.1 270 top
J90  [1X04_NO_SILK]  21.34,133.1 270 top
J91  [1X04_NO_SILK]  34.54,133.1 270 top
J92  [1X04_NO_SILK]  47.75,133.1 270 top
J93  [1X04_NO_SILK]  60.96,133.1 270 top
J94  [1X04_NO_SILK]  74.17,133.1 270 top
J95  [1X04_NO_SILK]  87.38,133.1 270 top
J96  [1X04_NO_SILK]  100.58,133.1 270 top
J97  [1X04_NO_SILK]  8.13,143.76 270 top
J98  [1X04_NO_SILK]  21.34,143.76 270 top
J99  [1X04_NO_SILK]  34.54,143.76 270 top
J100  [1X04_NO_SILK]  47.75,143.76 270 top
J101  [1X04_NO_SILK]  60.96,143.76 270 top
J102  [1X04_NO_SILK]  74.17,143.76 270 top
J103  [1X04_NO_SILK]  87.38,143.76 270 top
J104  [1X04_NO_SILK]  100.58,143.76 270 top
L1  4.7μH  [INDUCTOR_4X4MM]  16.76,14.22 90 top
L2  4.7μH  [INDUCTOR_4X4MM]  29.97,14.22 90 top
L3  4.7μH  [INDUCTOR_4X4MM]  43.18,14.22 90 top
L4  4.7μH  [INDUCTOR_4X4MM]  56.39,14.22 90 top
L5  4.7μH  [INDUCTOR_4X4MM]  69.6,14.22 90 top
L6  4.7μH  [INDUCTOR_4X4MM]  82.8,14.22 90 top
L7  4.7μH  [INDUCTOR_4X4MM]  96.01,14.22 90 top
L8  4.7μH  [INDUCTOR_4X4MM]  109.22,14.22 90 top
L9  4.7μH  [INDUCTOR_4X4MM]  16.76,24.89 90 top
L10  4.7μH  [INDUCTOR_4X4MM]  29.97,24.89 90 top
L11  4.7μH  [INDUCTOR_4X4MM]  43.18,24.89 90 top
L12  4.7μH  [INDUCTOR_4X4MM]  56.39,24.89 90 top
L13  4.7μH  [INDUCTOR_4X4MM]  69.6,24.89 90 top
L14  4.7μH  [INDUCTOR_4X4MM]  82.8,24.89 90 top
L15  4.7μH  [INDUCTOR_4X4MM]  96.01,24.89 90 top
L16  4.7μH  [INDUCTOR_4X4MM]  109.22,24.89 90 top
L17  4.7μH  [INDUCTOR_4X4MM]  16.76,35.56 90 top
L18  4.7μH  [INDUCTOR_4X4MM]  29.97,35.56 90 top
L19  4.7μH  [INDUCTOR_4X4MM]  43.18,35.56 90 top
L20  4.7μH  [INDUCTOR_4X4MM]  56.39,35.56 90 top
L21  4.7μH  [INDUCTOR_4X4MM]  69.6,35.56 90 top
L22  4.7μH  [INDUCTOR_4X4MM]  82.8,35.56 90 top
L23  4.7μH  [INDUCTOR_4X4MM]  96.01,35.56 90 top
L24  4.7μH  [INDUCTOR_4X4MM]  109.22,35.56 90 top
L25  4.7μH  [INDUCTOR_4X4MM]  16.76,46.23 90 top
L26  4.7μH  [INDUCTOR_4X4MM]  29.97,46.23 90 top
L27  4.7μH  [INDUCTOR_4X4MM]  43.18,46.23 90 top
L28  4.7μH  [INDUCTOR_4X4MM]  56.39,46.23 90 top
L29  4.7μH  [INDUCTOR_4X4MM]  69.6,46.23 90 top
L30  4.7μH  [INDUCTOR_4X4MM]  82.8,46.23 90 top
L31  4.7μH  [INDUCTOR_4X4MM]  96.01,46.23 90 top
L32  4.7μH  [INDUCTOR_4X4MM]  109.22,46.23 90 top
L33  4.7μH  [INDUCTOR_4X4MM]  16.76,56.9 90 top
L34  4.7μH  [INDUCTOR_4X4MM]  29.97,56.9 90 top
L35  4.7μH  [INDUCTOR_4X4MM]  43.18,56.9 90 top
L36  4.7μH  [INDUCTOR_4X4MM]  56.39,56.9 90 top
L37  4.7μH  [INDUCTOR_4X4MM]  69.6,56.9 90 top
L38  4.7μH  [INDUCTOR_4X4MM]  82.8,56.9 90 top
L39  4.7μH  [INDUCTOR_4X4MM]  96.01,56.9 90 top
L40  4.7μH  [INDUCTOR_4X4MM]  109.22,56.9 90 top
L41  4.7μH  [INDUCTOR_4X4MM]  16.76,67.56 90 top
L42  4.7μH  [INDUCTOR_4X4MM]  29.97,67.56 90 top
L43  4.7μH  [INDUCTOR_4X4MM]  43.18,67.56 90 top
L44  4.7μH  [INDUCTOR_4X4MM]  56.39,67.56 90 top
L45  4.7μH  [INDUCTOR_4X4MM]  69.6,67.56 90 top
L46  4.7μH  [INDUCTOR_4X4MM]  82.8,67.56 90 top
L47  4.7μH  [INDUCTOR_4X4MM]  96.01,67.56 90 top
L48  4.7μH  [INDUCTOR_4X4MM]  109.22,67.56 90 top
L49  4.7μH  [INDUCTOR_4X4MM]  16.76,78.23 90 top
L50  4.7μH  [INDUCTOR_4X4MM]  29.97,78.23 90 top
L51  4.7μH  [INDUCTOR_4X4MM]  43.18,78.23 90 top
L52  4.7μH  [INDUCTOR_4X4MM]  56.39,78.23 90 top
L53  4.7μH  [INDUCTOR_4X4MM]  69.6,78.23 90 top
L54  4.7μH  [INDUCTOR_4X4MM]  82.8,78.23 90 top
L55  4.7μH  [INDUCTOR_4X4MM]  96.01,78.23 90 top
L56  4.7μH  [INDUCTOR_4X4MM]  109.22,78.23 90 top
L57  4.7μH  [INDUCTOR_4X4MM]  16.76,88.9 90 top
L58  4.7μH  [INDUCTOR_4X4MM]  29.97,88.9 90 top
L59  4.7μH  [INDUCTOR_4X4MM]  43.18,88.9 90 top